# Altium PCB ADC_PCB.PcbDoc (part 1 of 2)
Units mil, origin at the board's own origin, x right, y up, seen from the top; angles counter-clockwise.
Board outline 5600 x 4000 mil, 4 copper layers (Top Layer, Plane(Gnd), Plane(Power), Bottom Layer), stack 23.756 mil thick; 244 components, 233 nets, 649 pads, 177 vias.
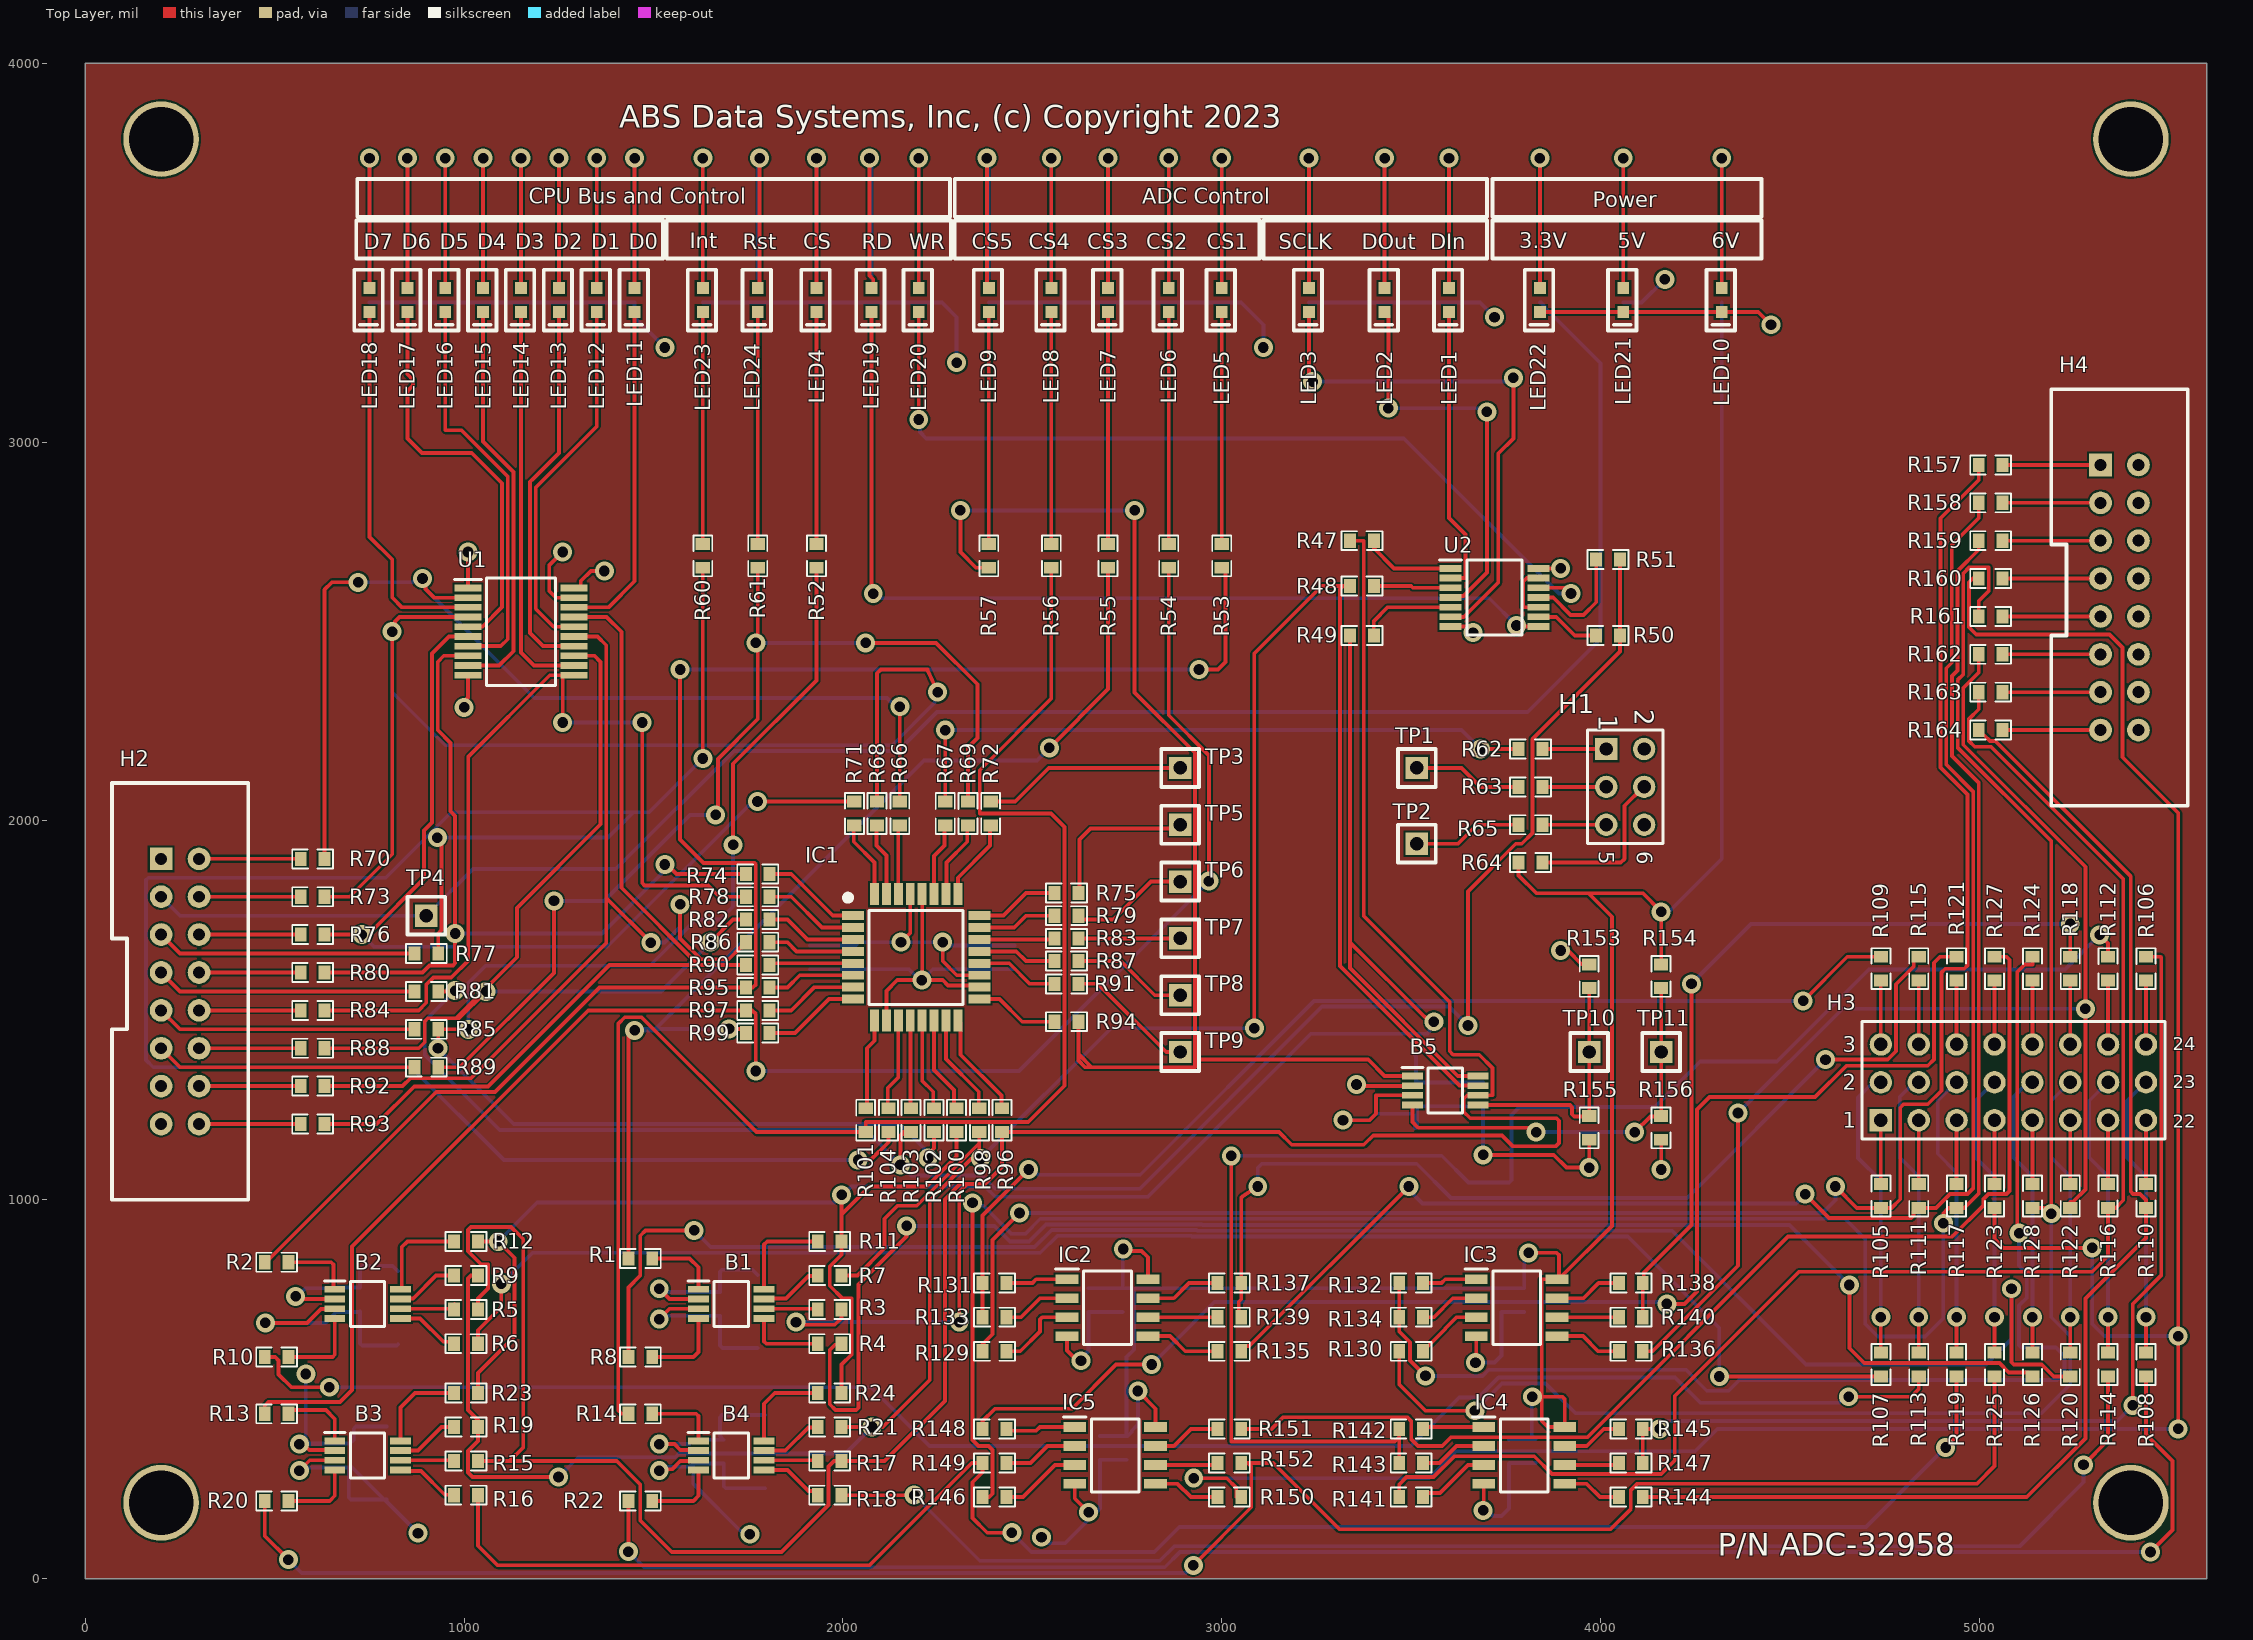
[diagram p0: Top Layer view]
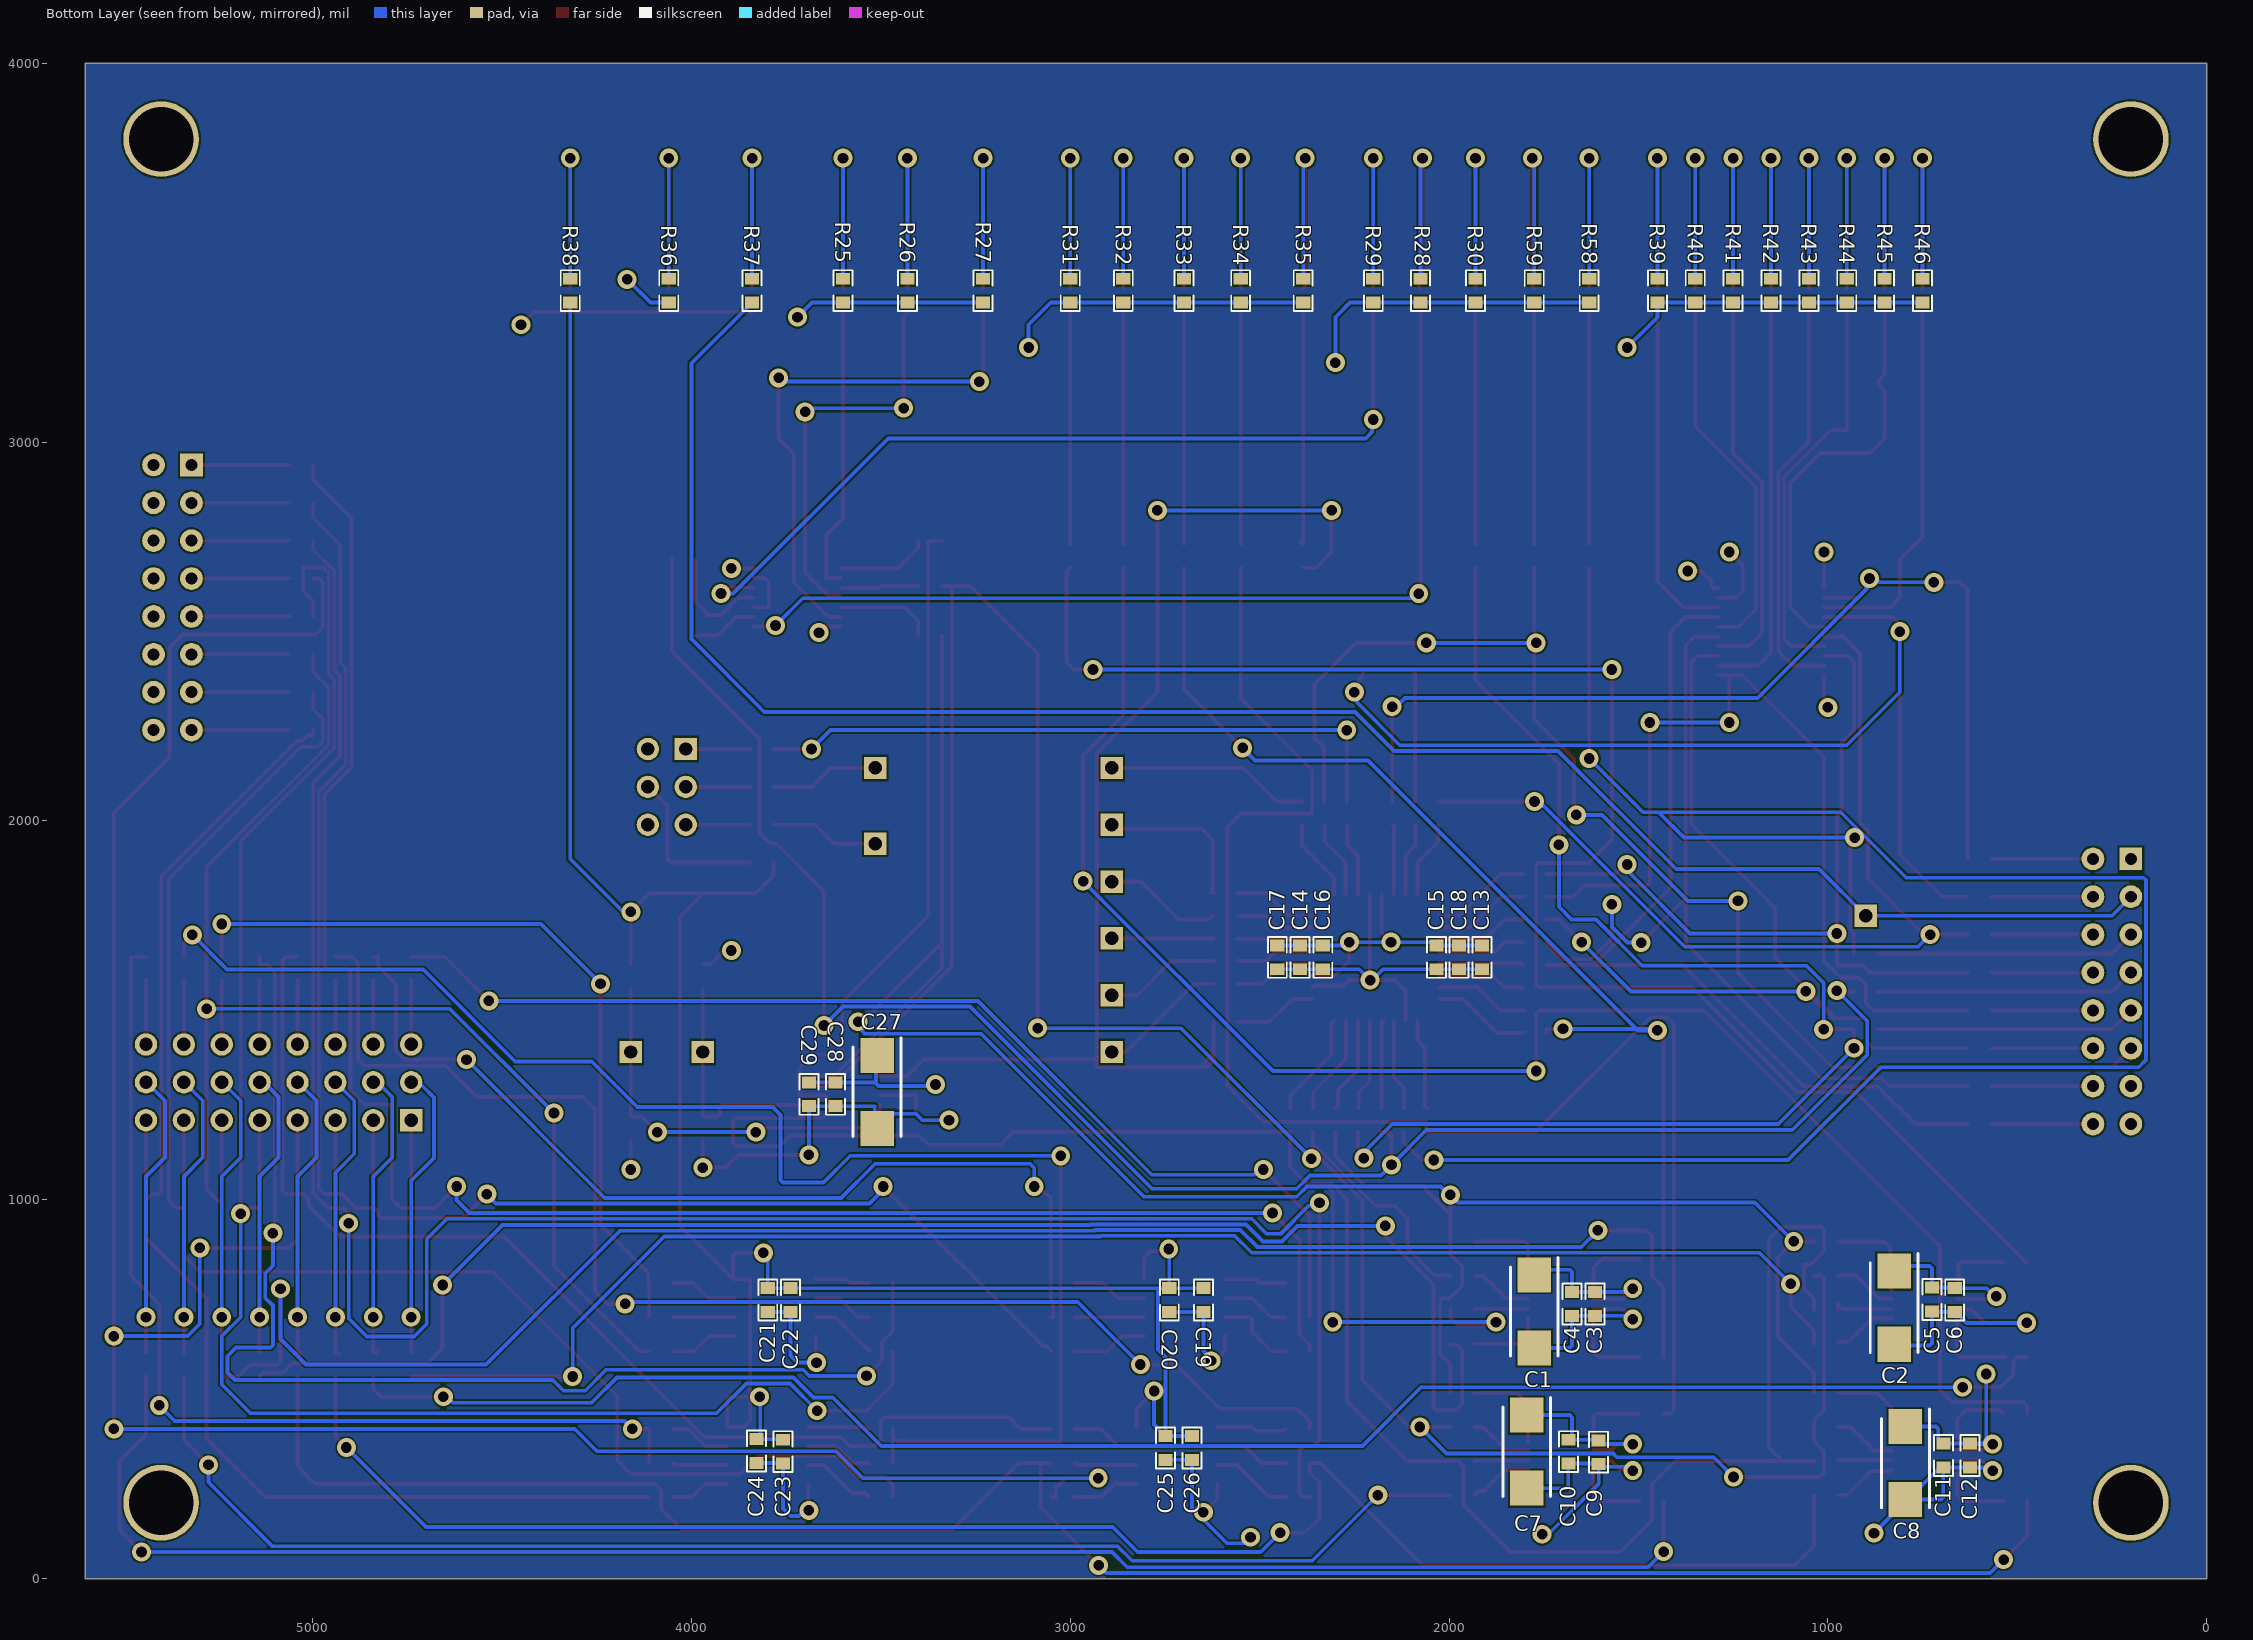
[diagram p1: Bottom Layer view, seen from below]
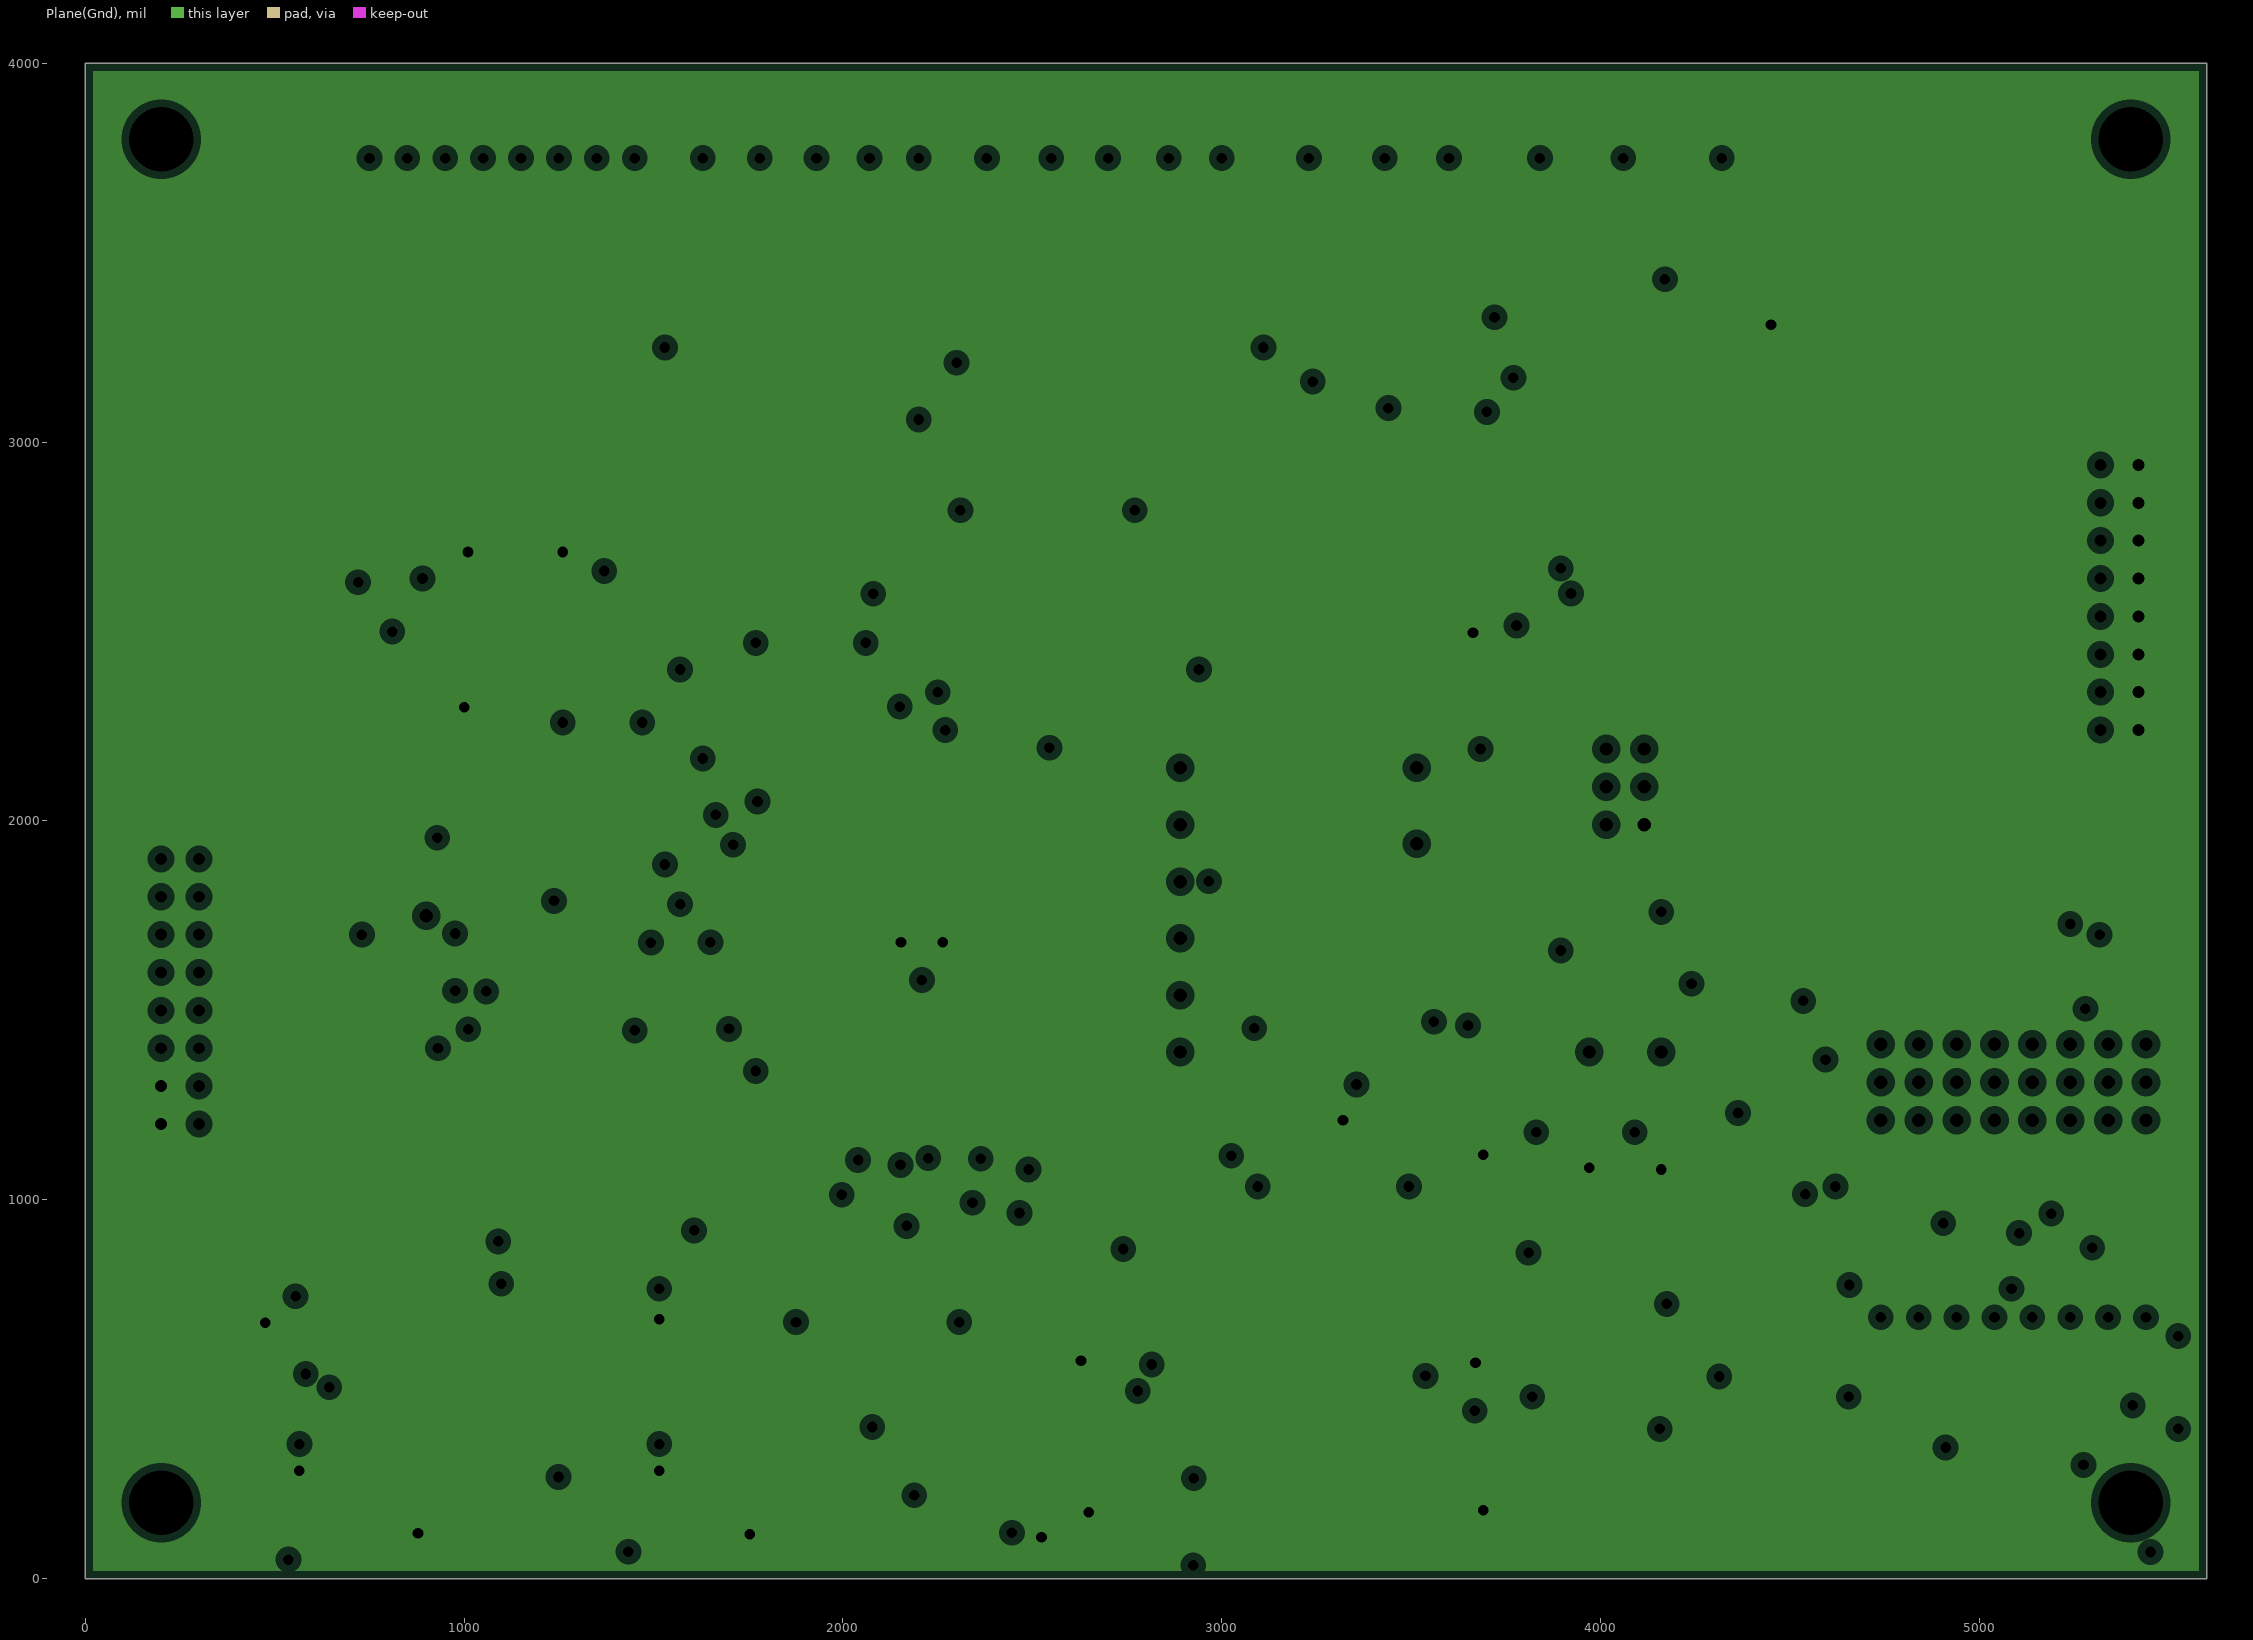
[diagram p2: Plane(Gnd), clearances drawn from the general rule]
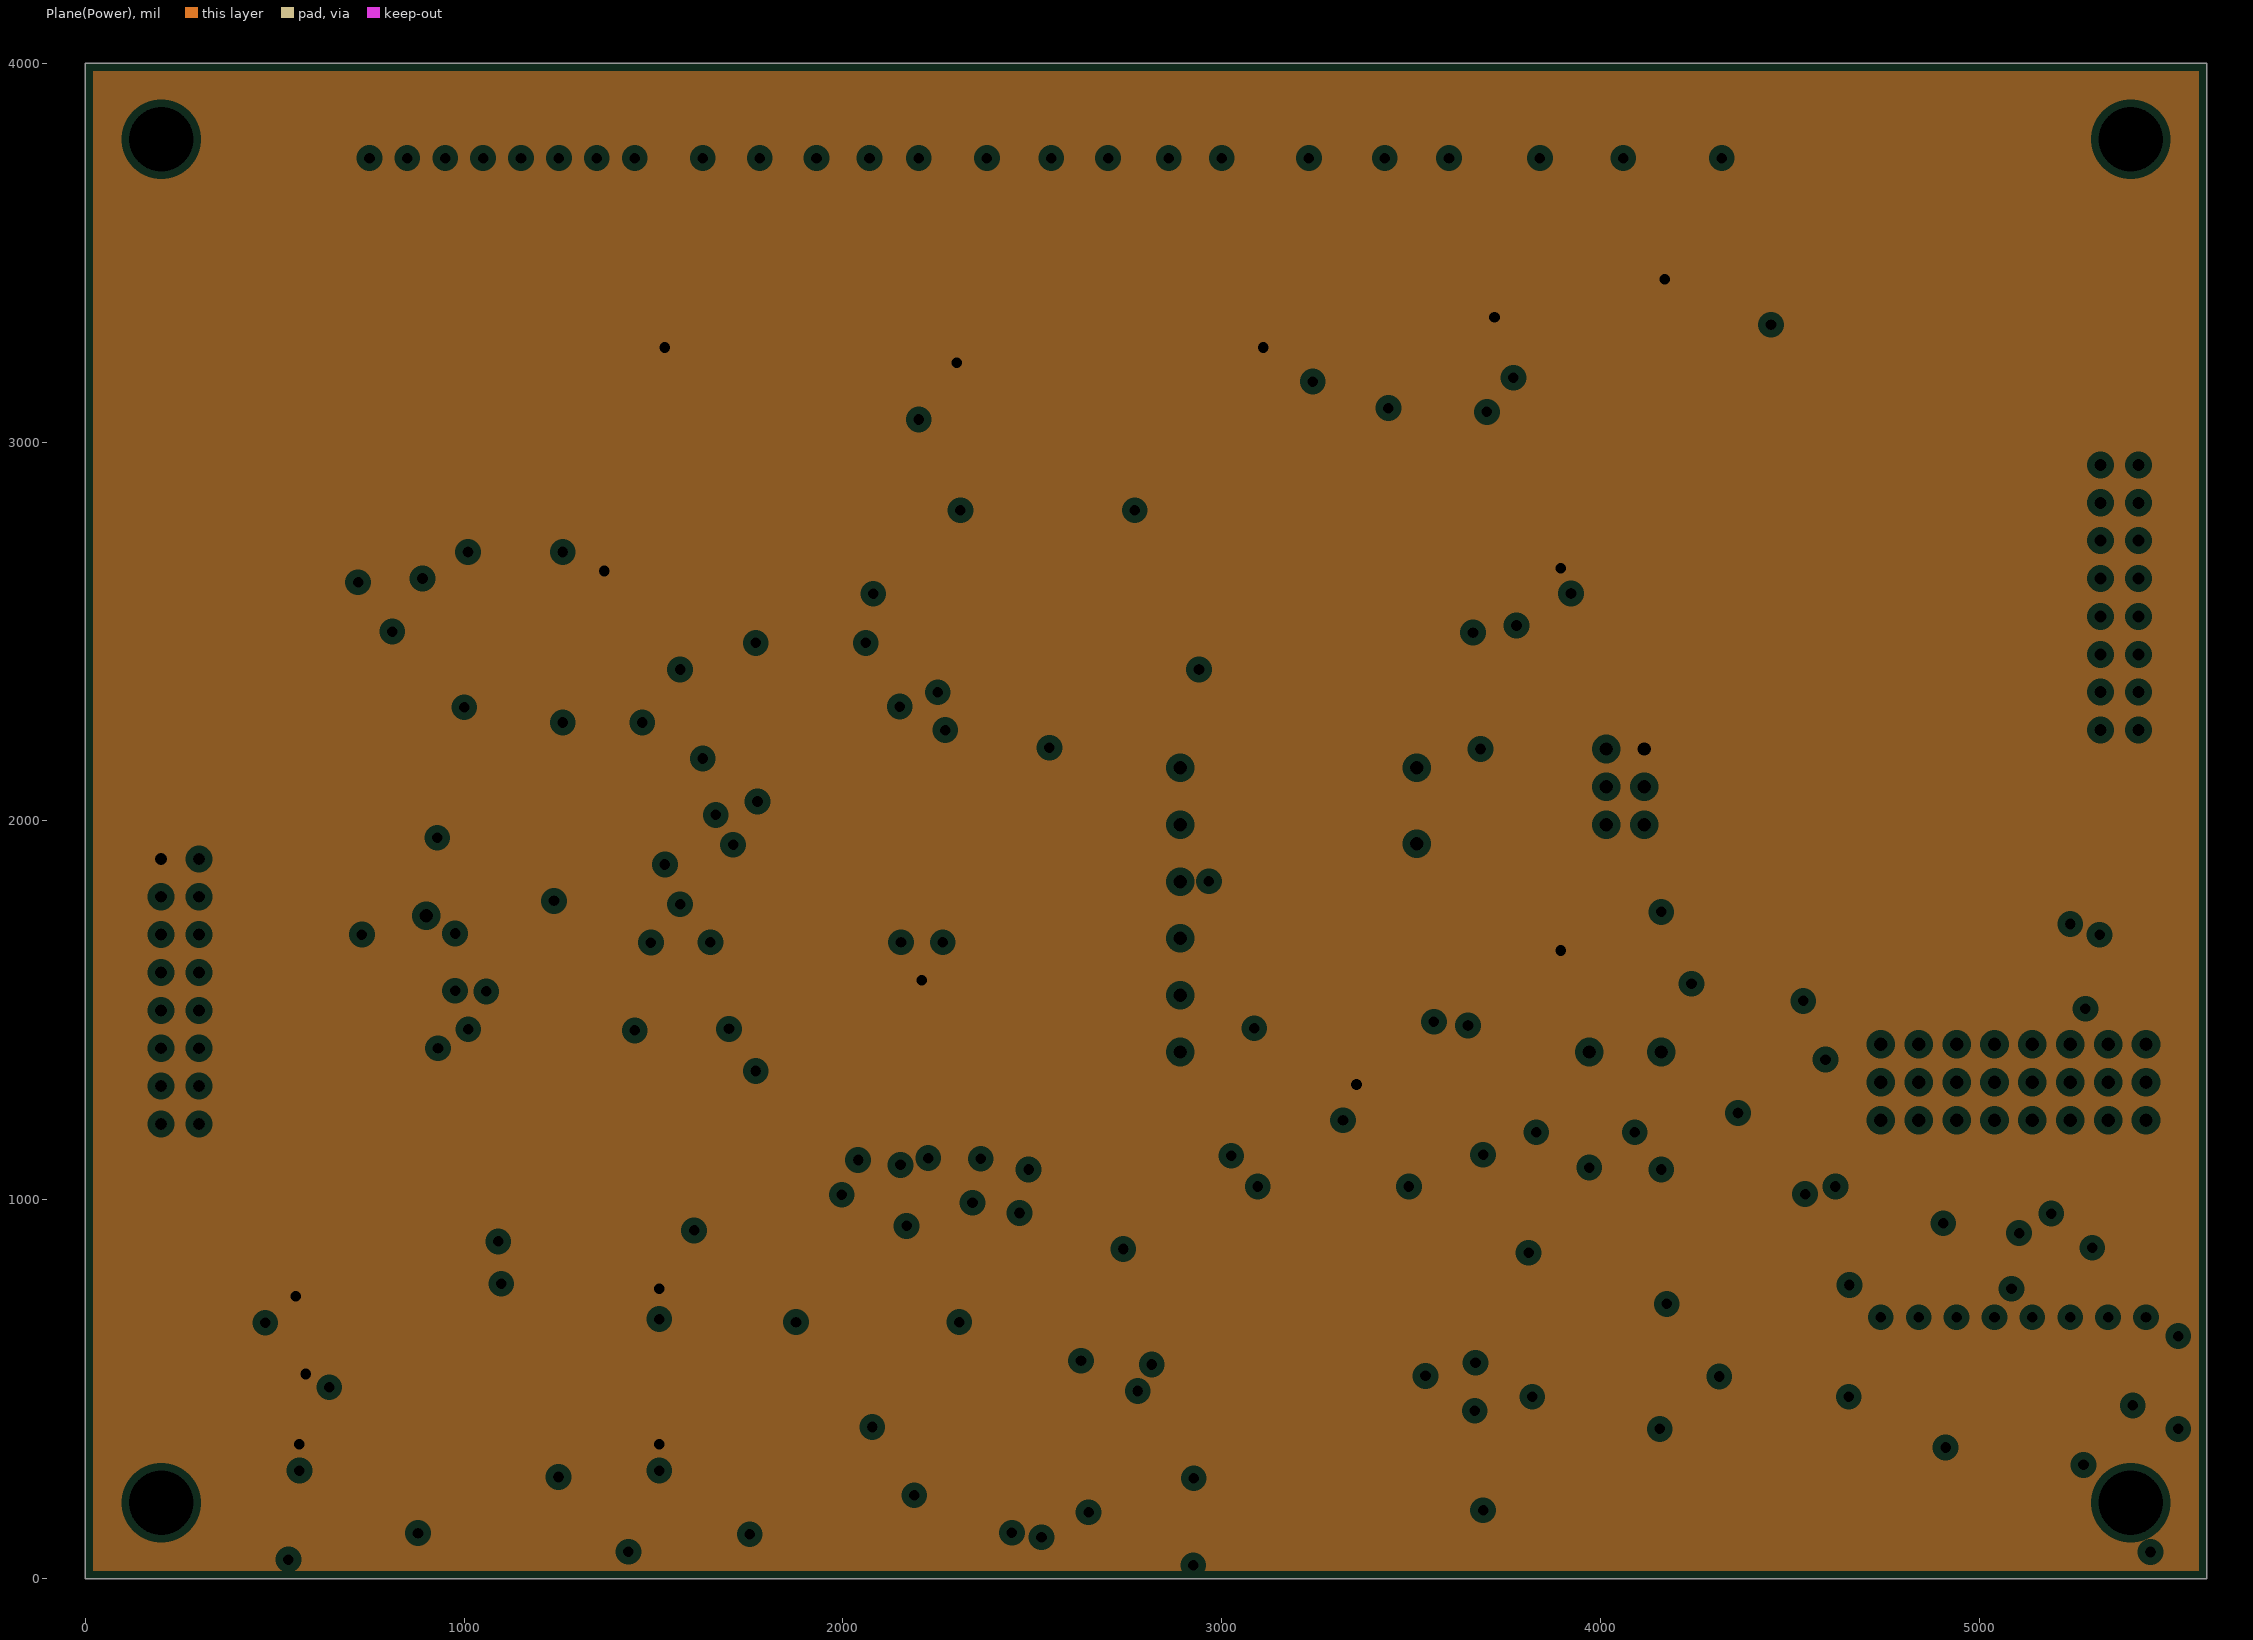
[diagram p3: Plane(Power), clearances drawn from the general rule]
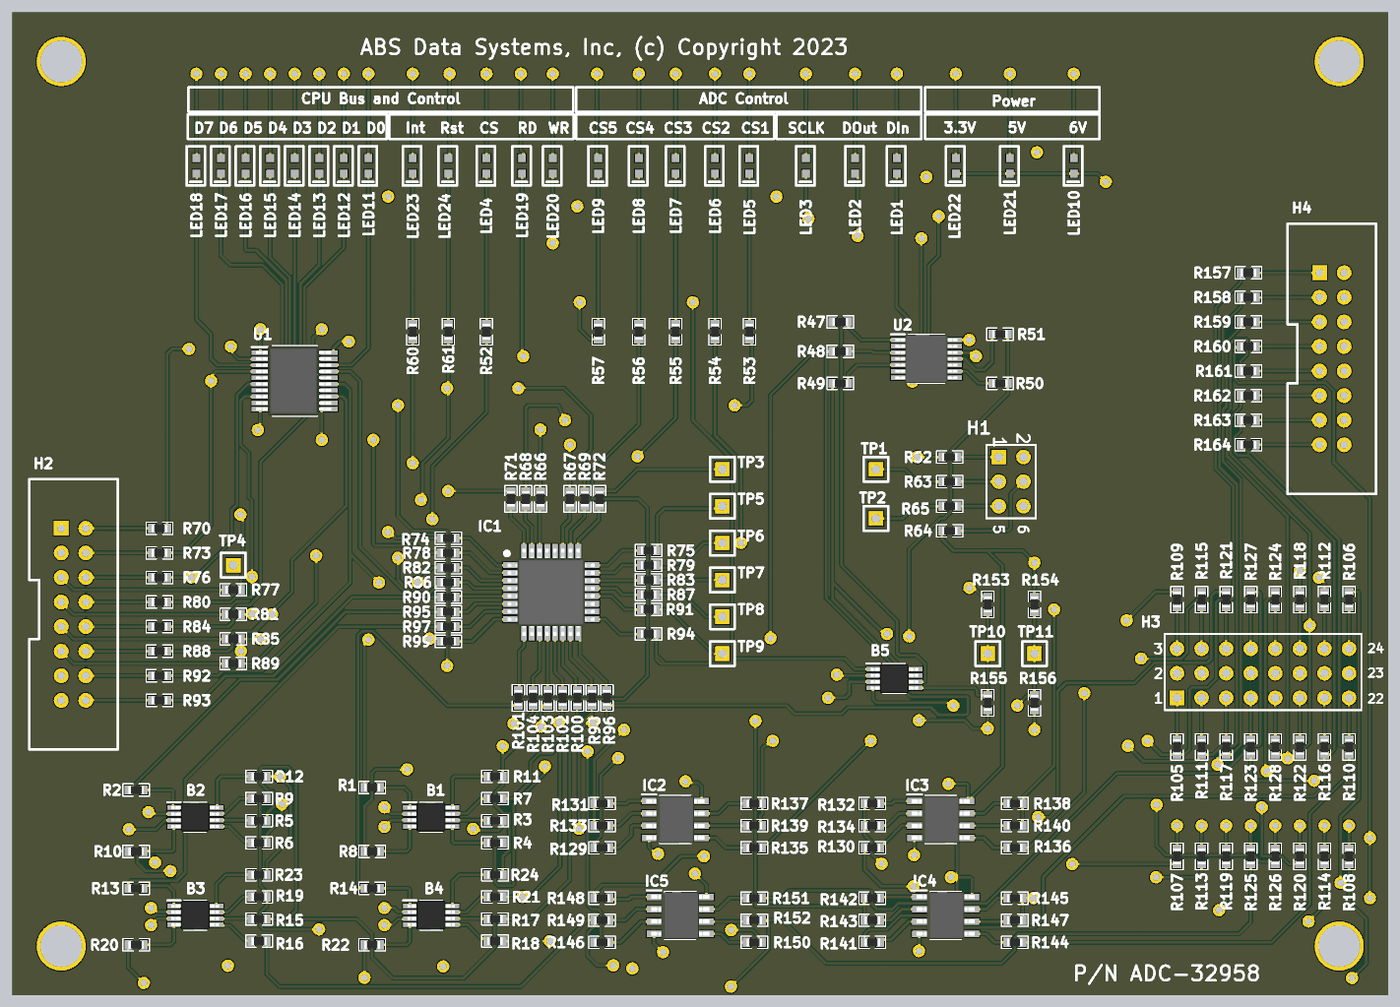
[diagram p5: 3D render of the assembled board from above, using the file's embedded part models]
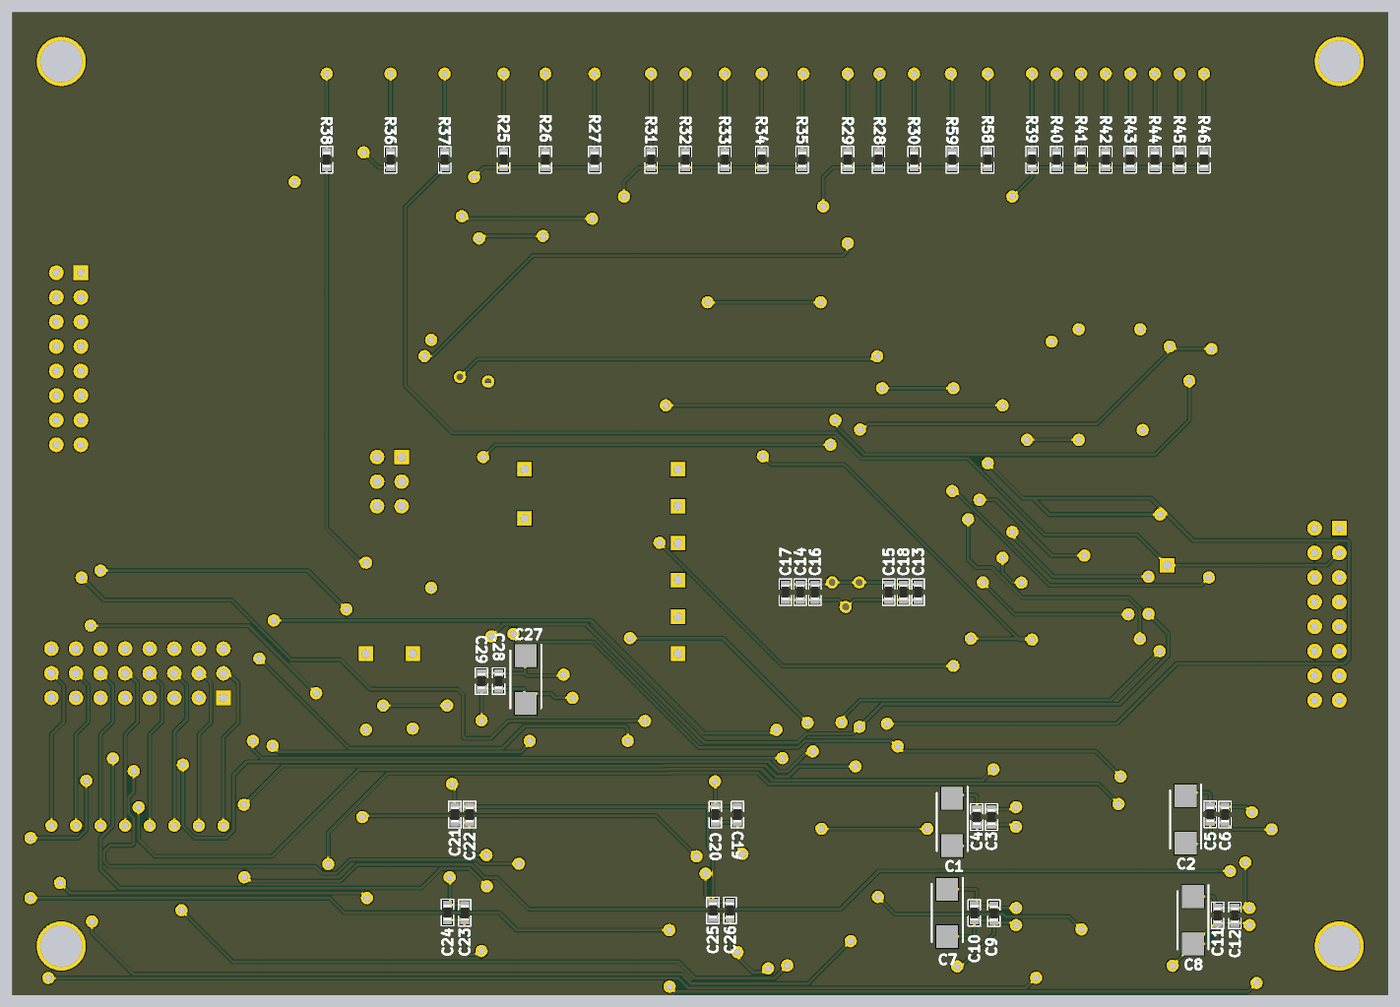
[diagram p6: 3D render of the assembled board from below, using the file's embedded part models]

## Layer stack, top to bottom
Top Solder: solder mask 0.4, Solder Resist, Dk 3.5
Top Layer: signal copper 1.4
Dielectric 2: prepreg 2.8, PP-006, Dk 4.1
Plane(Gnd): plane copper 1.378, net GND
Dielectric 1: dielectric 12.6, FR-4, Dk 4.8
Plane(Power): plane copper 1.378, net +5
Dielectric 3: prepreg 2.8, PP-006, Dk 4.1
Bottom Layer: signal copper 1.4
Bottom Solder: solder mask 0.4, Solder Resist, Dk 3.5

## Board outline
0,0 0,4000 5600,4000 5600,0

## Design rules (kind name [scope] priority, off if disabled: settings)
Clearance [All] p1: gap=5 ignorepadtopadclearanceinfootprint=FALSE
HoleSize [All] p1: absolutevalues=TRUE maxlimit=200 minlimit=1 maxpercent=80.000 minpercent=20.000
HoleToHoleClearance [All] p1: gap=5 allowstackedmicrovias=TRUE
MinimumSolderMaskSliver [All] p1: minsoldermaskwidth=4
PlaneClearance [All] p1: clearance=20
PlaneConnect [All] p1: planeconnectstyle=Relief reliefexpansion=20 reliefentries=4 reliefconductorwidth=10 reliefairgap=10
PolygonConnect [All] p1: connectstyle=Relief reliefconductorwidth=10 reliefentries=4 polygonreliefangle="90 Angle" airgapwidth=10
RoutingVias [All] p1: holewidth=28 width=50 viastyle="Through Hole" minholewidth=28 minwidth=50 maxholewidth=28 maxwidth=50
SilkToSilkClearance [All] p1: silktosilkclearance=5
SilkToSolderMaskClearance [IsPad] p1: minsilkscreentomaskgap=3.5 clearancetoexposedcopper=TRUE
SolderMaskExpansion [All] p1: expansion=4 istentingtop=FALSE
Width [All] p1: maxlimit=10 minlimit=10 preferedwidth=10
23 further rules are at their usual default settings.

## Classes and differential pairs
component class ADC_Unity_Gain: C19 C20 C21 C22 C23 C24 C25 C26 IC2 IC3 IC4 IC5 R129 R130 R131 R132 R133 R134 R135 R136 R137 R138 R139 R140 R141 R142 R143 R144 R145 R146 R147 R148 R149 R150 R151 R152 TitleBlock_5
component class ADC_LED_Monitor: LED1 LED2 LED3 LED4 LED5 LED6 LED7 LED8 LED9 LED10 LED11 LED12 LED13 LED14 LED15 LED16 LED17 LED18 LED19 LED20 LED21 LED22 LED23 LED24 R25 R26 R27 R28 R29 R30 R31 R32 R33 R34 R35 R36 R37 R38 R39 R40 R41 R42 R43 R44 R45 R46 R47 R48 R49 R50 R51 R52 R53 R54 R55 R56 R57 R58 R59 R60 R61 TitleBlock_2 U1 U2
component class ADC_Input: H4 R157 R158 R159 R160 R161 R162 R163 R164 TitleBlock_7
component class ADC_CPU: C13 C14 C15 C16 C17 C18 H1 H2 IC1 R62 R63 R64 R65 R66 R67 R68 R69 R70 R71 R72 R73 R74 R75 R76 R77 R78 R79 R80 R81 R82 R83 R84 R85 R86 R87 R88 R89 R90 R91 R92 R93 R94 R95 R96 R97 R98 R99 R100 R101 R102 R103 R104 TitleBlock_3 TP1 TP2 TP3 TP4 TP5 TP6 TP7 TP8 TP9
component class ADC_Configuration: H3 R105 R106 R107 R108 R109 R110 R111 R112 R113 R114 R115 R116 R117 R118 R119 R120 R121 R122 R123 R124 R125 R126 R127 R128 TitleBlock_4
component class ADC_Channels: B1 B2 B3 B4 C1 C2 C3 C4 C5 C6 C7 C8 C9 C10 C11 C12 R1 R2 R3 R4 R5 R6 R7 R8 R9 R10 R11 R12 R13 R14 R15 R16 R17 R18 R19 R20 R21 R22 R23 R24 TitleBlock_1
component class ADC_Calibration: B5 C27 C28 C29 R153 R154 R155 R156 TitleBlock_6 TP10 TP11

## Components (designator, comment, footprint, x,y, rotation, side; value= is the part's Value field where it differs from the comment)
B1 "ADC122S021CIMMX_NOPB" SOP65P490X110-8N 1705,725 r0 top locked
B2 "ADC122S021CIMMX_NOPB" SOP65P490X110-8N 745,725 r0 top locked
B3 "ADC122S021CIMMX_NOPB" SOP65P490X110-8N 745,325 r0 top locked
B4 "ADC122S021CIMMX_NOPB" SOP65P490X110-8N 1705,325 r0 top locked
B5 "ADC122S021CIMMX_NOPB" SOP65P490X110-8N 3590,1288.5 r0 top locked
C1 "293D475X9035C2TE3" CAPPM6032X280N 1775,705 r270 bottom locked
C2 "293D475X9035C2TE3" CAPPM6032X280N 825,715 r270 bottom locked
C3 "1uf" 0603 1615,725 r270 bottom locked
C4 "100nf" 0603 1675,725 r270 bottom locked
C5 "1uf" 0603 725,736.5 r270 bottom locked
C6 "100nf" 0603 665,735 r270 bottom locked
C7 "293D475X9035C2TE3" CAPPM6032X280N 1795,335 r270 bottom locked
C8 "293D475X9035C2TE3" CAPPM6032X280N 795,305 r270 bottom locked
C9 "1uf" 0603 1605,333.5 r270 bottom locked
C10 "100nf" 0603 1685,335 r270 bottom locked
C11 "1uf" 0603 695,325 r270 bottom locked
C12 "100nf" 0603 625,325 r270 bottom locked
C13 "1uf" 0603 1913.32,1640 r90 bottom locked
C14 "100nf" 0603 2393.32,1640 r90 bottom locked
C15 "1uf" 0603 2033.32,1640 r90 bottom locked
C16 "100nf" 0603 2333.32,1640 r90 bottom locked
C17 "1uf" 0603 2453.32,1640 r90 bottom locked
C18 "100nf" 0603 1973.32,1640 r90 bottom locked
C19 "1uf" 0603 2648.5,735 r270 bottom locked
C20 "100nf" 0603 2738.5,735 r270 bottom locked
C21 "1uf" 0603 3798.5,735 r270 bottom locked
C22 "100nf" 0603 3738.5,735 r270 bottom locked
C23 "1uf" 0603 3758.5,335 r270 bottom locked
C24 "100nf" 0603 3828.5,336.5 r270 bottom locked
C25 "100nf" 0603 2748.5,345 r270 bottom locked
C26 "1uf" 0603 2678.5,345 r270 bottom locked
C27 "293D475X9035C2TE3" CAPPM6032X280N 3510,1284.96 r270 bottom locked
C28 "1uf" 0603 3620,1278.5 r270 bottom locked
C29 "100nf" 0603 3690,1278.5 r270 bottom locked
H1 "UDPI Programmer" HDR2X3 4015,2190 r270 top locked
H2 "Header_IDC_2x8" HEADER16 200,1900 r0 top
H3 "Header_3x8" HDR3X8 4740,1210 r0 top
H4 "Header_IDC_2x8" HEADER16 5320,2940 r0 top locked
IC1 "AVR64DD32-I_PT" QFP80P900X900X120-32N 2193.32,1640 r0 top locked
IC2 "LM358DR" SOIC127P600X175-8N 2698.5,715 r0 top locked
IC3 "LM358DR" SOIC127P600X175-8N 3778.5,715 r0 top locked
IC4 "LM358DR" SOIC127P600X175-8N 3798.5,325 r0 top locked
IC5 "LM358DR" SOIC127P600X175-8N 2718.5,325 r0 top locked
LED1 "green" 0603_DIODE 3600,3375 r90 top
LED2 "green" 0603_DIODE 3430,3375 r90 top
LED3 "green" 0603_DIODE 3230,3375 r90 top
LED4 "green" 0603_DIODE 1930,3375 r90 top
LED5 "green" 0603_DIODE 3000,3375 r90 top
LED6 "green" 0603_DIODE 2860,3375 r90 top
LED7 "green" 0603_DIODE 2700,3375 r90 top
LED8 "green" 0603_DIODE 2550,3375 r90 top
LED9 "green" 0603_DIODE 2385,3375 r90 top
LED10 "blue" 0603_DIODE 4320,3375 r90 top
LED11 "green" 0603_DIODE 1450,3375 r90 top
LED12 "green" 0603_DIODE 1350,3375 r90 top
LED13 "green" 0603_DIODE 1250,3375 r90 top
LED14 "green" 0603_DIODE 1150,3375 r90 top
LED15 "green" 0603_DIODE 1050,3375 r90 top
LED16 "green" 0603_DIODE 950,3375 r90 top
LED17 "green" 0603_DIODE 850,3375 r90 top
LED18 "green" 0603_DIODE 750,3375 r90 top
LED19 "green" 0603_DIODE 2075,3375 r90 top
LED20 "red" 0603_DIODE 2200,3375 r90 top
LED21 "red" 0603_DIODE 4060,3375 r90 top
LED22 "amber" 0603_DIODE 3840,3375 r90 top
LED23 "amber" 0603_DIODE 1630,3375 r90 top
LED24 "blue" 0603_DIODE 1775,3375 r90 top
R1 "0R" 0603 1465,845 r0 top locked
R2 "0R" 0603 505,835 r0 top locked
R3 "0R" 0603 1965,710 r180 top locked
R4 "0R" 0603 1965,620 r0 top locked
R5 "0R" 0603 1005,710 r180 top locked
R6 "0R" 0603 1005,620 r0 top locked
R7 "0R" 0603 1965,800 r180 top locked
R8 "0R" 0603 1465,585 r180 top locked
R9 "0R" 0603 1005,800 r180 top locked
R10 "0R" 0603 505,585 r180 top locked
R11 "0R" 0603 1965,890 r180 top locked
R12 "0R" 0603 1005,890 r180 top locked
R13 "0R" 0603 505,435 r0 top locked
R14 "0R" 0603 1465,435 r0 top locked
R15 "0R" 0603 1005,310 r180 top locked
R16 "0R" 0603 1005,220 r0 top locked
R17 "0R" 0603 1965,310 r180 top locked
R18 "0R" 0603 1965,220 r0 top locked
R19 "0R" 0603 1005,400 r180 top locked
R20 "0R" 0603 505,205 r180 top locked
R21 "0R" 0603 1965,400 r180 top locked
R22 "0R" 0603 1465,205 r180 top locked
R23 "0R" 0603 1005,490 r180 top locked
R24 "0R" 0603 1965,490 r180 top locked
R25 "180" 0603 3600,3400 r270 bottom
R26 "180" 0603 3430,3400 r270 bottom
R27 "180" 0603 3230,3400 r270 bottom
R28 "180" 0603 2075,3400 r270 bottom
R29 "180" 0603 2200,3400 r270 bottom
R30 "180" 0603 1930,3400 r270 bottom
R31 "180" 0603 3000,3400 r270 bottom
R32 "180" 0603 2860,3400 r270 bottom
R33 "180" 0603 2700,3400 r270 bottom
R34 "180" 0603 2550,3400 r270 bottom
R35 "180" 0603 2385,3400 r270 bottom
R36 "180" 0603 4060,3400 r270 bottom
R37 "47" 0603 3840,3400 r90 bottom
R38 "180" 0603 4320,3400 r270 bottom
R39 "180" 0603 1450,3400 r270 bottom
R40 "180" 0603 1350,3400 r270 bottom
R41 "180" 0603 1250,3400 r270 bottom
R42 "180" 0603 1150,3400 r270 bottom
R43 "180" 0603 1050,3400 r270 bottom
R44 "180" 0603 950,3400 r270 bottom
R45 "180" 0603 850,3400 r270 bottom
R46 "180" 0603 750,3400 r270 bottom
R47 "0R" 0603 3370,2740 r0 top
R48 "0R" 0603 3370,2620 r0 top
R49 "0R" 0603 3370,2490 r0 top
R50 "0R" 0603 4020,2490 r180 top
R51 "0R" 0603 4020,2690 r180 top
R52 "0R" 0603 1930,2700 r90 top locked
R53 "0R" 0603 3000,2700 r90 top
R54 "0R" 0603 2860,2700 r90 top
R55 "0R" 0603 2700,2700 r90 top
R56 "0R" 0603 2550,2700 r90 top
R57 "0R" 0603 2385,2700 r90 top
R58 "180" 0603 1630,3400 r270 bottom
R59 "100" 0603 1775,3400 r90 bottom
R60 "0R" 0603 1630,2700 r90 top locked
R61 "0R" 0603 1775,2700 r90 top locked
R62 "0R" 0603 3815,2190 r0 top locked
R63 "0R" 0603 3815,2090 r0 top locked
R64 "0R" 0603 3815,1890 r180 top locked
R65 "0R" 0603 3815,1990 r0 top locked
R66 "0R" 0603 2150,2020 r270 top locked
R67 "0R" 0603 2270,2020 r90 top locked
R68 "0R" 0603 2090,2020 r270 top locked
R69 "0R" 0603 2330,2020 r90 top locked
R70 "0R" 0603 600,1900 r180 top
R71 "0R" 0603 2030,2020 r270 top locked
R72 "0R" 0603 2390,2020 r90 top locked
R73 "0R" 0603 600,1800 r180 top
R74 "0R" 0603 1775,1860 r0 top locked
R75 "0R" 0603 2590,1810 r0 top locked
R76 "0R" 0603 600,1700 r180 top
R77 "0R" 0603 900,1650 r0 top
R78 "0R" 0603 1775,1800 r0 top locked
R79 "0R" 0603 2590,1750 r0 top locked
R80 "0R" 0603 600,1600 r180 top
R81 "0R" 0603 900,1550 r0 top
R82 "0R" 0603 1775,1740 r0 top locked
R83 "0R" 0603 2590,1690 r0 top locked
R84 "0R" 0603 600,1500 r180 top
R85 "0R" 0603 900,1450 r0 top
R86 "0R" 0603 1775,1680 r0 top locked
R87 "0R" 0603 2590,1630 r0 top locked
R88 "0R" 0603 600,1400 r180 top
R89 "0R" 0603 900,1350 r0 top
R90 "0R" 0603 1775,1620 r0 top locked
R91 "0R" 0603 2590,1570 r0 top locked
R92 "0R" 0603 600,1300 r180 top
R93 "0R" 0603 600,1200 r180 top
R94 "0R" 0603 2590,1470 r0 top locked
R95 "0R" 0603 1775,1560 r0 top locked
R96 "0R" 0603 2420,1210 r270 top locked
R97 "0R" 0603 1775,1500 r0 top locked
R98 "0R" 0603 2360,1210 r270 top locked
R99 "0R" 0603 1775,1440 r0 top locked
R100 "0R" 0603 2300,1210 r270 top locked
R101 "0R" 0603 2060,1210 r90 top locked
R102 "0R" 0603 2240,1210 r270 top locked
R103 "0R" 0603 2180,1210 r270 top locked
R104 "0R" 0603 2120,1210 r270 top locked
R105 "0R" 0603 4740,1010 r90 top locked
R106 "0R" 0603 5440,1610 r90 top locked
R107 "0R" 0603 4740,565 r90 top locked
R108 "0R" 0603 5440,565 r270 top locked
R109 "0R" 0603 4740,1610 r270 top locked
R110 "0R" 0603 5440,1010 r270 top locked
R111 "0R" 0603 4840,1010 r90 top locked
R112 "0R" 0603 5340,1610 r90 top locked
R113 "0R" 0603 4840,565 r90 top locked
R114 "0R" 0603 5340,565 r270 top locked
R115 "0R" 0603 4840,1610 r270 top locked
R116 "0R" 0603 5340,1010 r270 top locked
R117 "0R" 0603 4940,1010 r90 top locked
R118 "0R" 0603 5240,1610 r90 top locked
R119 "0R" 0603 4940,565 r90 top locked
R120 "0R" 0603 5240,565 r270 top locked
R121 "0R" 0603 4940,1610 r270 top locked
R122 "0R" 0603 5240,1010 r270 top locked
R123 "0R" 0603 5040,1010 r90 top locked
R124 "0R" 0603 5140,1610 r90 top locked
R125 "0R" 0603 5040,565 r90 top locked
R126 "0R" 0603 5140,565 r270 top locked
R127 "0R" 0603 5040,1610 r270 top locked
R128 "0R" 0603 5140,1010 r270 top locked
R129 "0R" 0603 2400,600 r180 top locked
R130 "0R" 0603 3500,600 r180 top locked
R131 "0R" 0603 2400,780 r0 top locked
R132 "0R" 0603 3500,780 r0 top locked
R133 "0R" 0603 2400,690 r180 top locked
R134 "0R" 0603 3500,690 r180 top locked
R135 "0R" 0603 3020,600 r0 top locked
R136 "0R" 0603 4080,600 r0 top locked
R137 "0R" 0603 3020,780 r180 top locked
R138 "0R" 0603 4080,780 r180 top locked
R139 "0R" 0603 3020,690 r0 top locked
R140 "0R" 0603 4080,690 r0 top locked
R141 "0R" 0603 3500,215 r180 top locked
R142 "0R" 0603 3500,395 r0 top locked
R143 "0R" 0603 3500,305 r180 top locked
R144 "0R" 0603 4080,215 r0 top locked
R145 "0R" 0603 4080,395 r180 top locked
R146 "0R" 0603 2400,215 r180 top locked
R147 "0R" 0603 4080,305 r0 top locked
R148 "0R" 0603 2400,395 r0 top locked
R149 "0R" 0603 2400,305 r180 top locked
R150 "0R" 0603 3020,215 r0 top locked
R151 "0R" 0603 3020,395 r180 top locked
R152 "0R" 0603 3020,305 r0 top locked
R153 "220" 0603 3970,1590 r270 top locked
R154 "220" 0603 4160,1590 r90 top locked
R155 "220" 0603 3970,1190 r90 top locked
R156 "220" 0603 4160,1190 r270 top locked
R157 "0R" 0603 5030,2940 r0 top locked
R158 "0R" 0603 5030,2840 r0 top locked
R159 "0R" 0603 5030,2740 r0 top locked
R160 "0R" 0603 5030,2640 r0 top locked
R161 "0R" 0603 5030,2540 r0 top locked
R162 "0R" 0603 5030,2440 r0 top locked
R163 "0R" 0603 5030,2340 r0 top locked
R164 "0R" 0603 5030,2240 r0 top locked
TP1 "TP" TP 3515,2140 r0 top locked
TP2 "TP" TP 3515,1940 r0 top locked
TP3 "TP" TP 2890,2140 r0 top locked
TP4 "TP" TP 900,1750 r0 top
TP5 "TP" TP 2890,1990 r0 top locked
TP6 "TP" TP 2890,1840 r0 top locked
TP7 "TP" TP 2890,1690 r0 top locked
TP8 "TP" TP 2890,1540 r0 top locked
TP9 "TP" TP 2890,1390 r0 top locked
TP10 "TP" TP 3970,1390 r0 top
TP11 "TP" TP 4160,1390 r0 top
U1 "SN74ABT240ADBR" SOP65P780X200-20N 1150,2500 r0 top locked
U2 "SN74AC04PWR" SOP65P640X120-14N 3720,2590 r0 top

## Footprints (in the part's own frame and the unit in brackets; to place one, negate y for a bottom-side part, rotate by r counter-clockwise, add the part's x,y. Pads: shape width x height; smd on the part's side, far side on the other; paste and mask are expansions set on the pad)
0603 [mm]
  rect 0.8x0.95 smd: 1(-0.8,0) 2(0.8,0)
  silkscreen extent -1.37,-0.64 1.37,0.64, body extent -0.8,-0.4 0.8,0.4, height 0.55
0603_DIODE [mm]
  rect 0.8x0.8 smd: 1(-0.8,0) 2(0.8,0)
  silkscreen extent -2.03,-0.89 2.03,1.02
CAPPM6032X280N [mm]
  rect 2.35x2.25 smd: 1(-2.45,0) 2(2.45,0)
  silkscreen extent -3.62,-1.6 3,1.6
HDR2X3 [mm] "Connector; Header; 3x2 Position"
  rect 1.5x1.5 hole 0.9: 1(0,0)
  round 1.5 hole 0.9: 2(0,2.54) 3(2.54,0) 4(2.54,2.54) 5(5.08,0) 6(5.08,2.54)
  silkscreen extent -1.27,-1.27 6.35,3.81
HDR3X8 [mm] "Connector; Header; 8x2 Position"
  rect 1.5x1.5 hole 0.9: 1(0,0)
  round 1.5 hole 0.9: 2(0,2.54) 3(0,5.08) 4(2.54,0) 5(2.54,2.54) 6(2.54,5.08) 7(5.08,0) 8(5.08,2.54) 9(5.08,5.08) 10(7.62,0) 11(7.62,2.54) 12(7.62,5.08) 13(10.16,0) 14(10.16,2.54) 15(10.16,5.08) 16(12.7,0) 17(12.7,2.54) 18(12.7,5.08) 19(15.24,0) 20(15.24,2.54) 21(15.24,5.08) 22(17.78,0) 23(17.78,2.54) 24(17.78,5.08)
  silkscreen extent -1.27,-1.27 19.05,6.6
HEADER16 [mil]
  rect 60x60 hole 31.5: 1(0,0)
  round 60 hole 31.5: 2(100,0) 3(0,-100) 4(100,-100) 5(0,-200) 6(100,-200) 7(0,-300) 8(100,-300) 9(0,-400) 10(100,-400) 11(0,-500) 12(100,-500) 13(0,-600) 14(100,-600) 15(0,-700) 16(100,-700)
  silkscreen extent -130,-900 230,200
QFP80P900X900X120-32N [mm]
  rect 1.475x0.6 smd: 1(-4.238,2.8) 2(-4.238,2) 3(-4.238,1.2) 4(-4.238,0.4) 5(-4.238,-0.4) 6(-4.238,-1.2) 7(-4.238,-2) 8(-4.238,-2.8) 17(4.238,-2.8) 18(4.238,-2) 19(4.238,-1.2) 20(4.238,-0.4) 21(4.238,0.4) 22(4.238,1.2) 23(4.238,2) 24(4.238,2.8)
  rect 0.6x1.475 smd: 9(-2.8,-4.238) 10(-2,-4.238) 11(-1.2,-4.238) 12(-0.4,-4.238) 13(0.4,-4.238) 14(1.2,-4.238) 15(2,-4.238) 16(2.8,-4.238) 25(2.8,4.238) 26(2,4.238) 27(1.2,4.238) 28(0.4,4.238) 29(-0.4,4.238) 30(-1.2,4.238) 31(-2,4.238) 32(-2.8,4.238)
  silkscreen extent -4.77,-3.15 3.15,4.2, body extent -4.5,-4.5 4.5,4.5, height 1.2
SOIC127P600X175-8N [mm]
  rect 1.528x0.65 smd: 1(-2.711,1.905) 2(-2.711,0.635) 3(-2.711,-0.635) 4(-2.711,-1.905) 5(2.711,-1.905) 6(2.711,-0.635) 7(2.711,0.635) 8(2.711,1.905)
  silkscreen extent -3.48,-2.45 1.6,2.58, body extent -3.01,-2.45 3.01,2.45, height 1.63
SOP65P490X110-8N [mm]
  rect 1.4x0.45 smd: 1(-2.2,0.975) 2(-2.2,0.325) 3(-2.2,-0.325) 4(-2.2,-0.975) 5(2.2,-0.975) 6(2.2,-0.325) 7(2.2,0.325) 8(2.2,0.975)
  silkscreen extent -2.9,-1.5 1.15,1.55, body extent -2.45,-1.5 2.45,1.5, height 1.1
SOP65P640X120-14N [mm]
  rect 1.475x0.45 smd: 1(-2.938,1.95) 2(-2.938,1.3) 3(-2.938,0.65) 4(-2.938,0) 5(-2.938,-0.65) 6(-2.938,-1.3) 7(-2.938,-1.95) 8(2.938,-1.95) 9(2.938,-1.3) 10(2.938,-0.65) 11(2.938,0) 12(2.938,0.65) 13(2.938,1.3) 14(2.938,1.95)
  silkscreen extent -3.67,-2.5 1.85,2.53, body extent -3.2,-2.5 3.2,2.5, height 1.13
SOP65P780X200-20N [mm]
  rect 1.8x0.45 smd: 1(-3.55,2.925) 2(-3.55,2.275) 3(-3.55,1.625) 4(-3.55,0.975) 5(-3.55,0.325) 6(-3.55,-0.325) 7(-3.55,-0.975) 8(-3.55,-1.625) 9(-3.55,-2.275) 10(-3.55,-2.925) 11(3.55,-2.925) 12(3.55,-2.275) 13(3.55,-1.625) 14(3.55,-0.975) 15(3.55,-0.325) 16(3.55,0.325) 17(3.55,0.975) 18(3.55,1.625) 19(3.55,2.275) 20(3.55,2.925)
  silkscreen extent -4.45,-3.6 2.3,3.6, body extent -4.03,-3.6 3.77,3.6, height 1.9
TP [mm] "Test Point"
  rect 1.5x1.5 hole 0.9: 1(0,0)
  silkscreen extent -1.27,-1.27 1.27,1.27

## Part data
B1 B2 B3 B4 B5: "2 Channel, 50 ksps to 200 ksps 12-Bit A/D Converter", Manufacturer_Name="Texas Instruments", Manufacturer_Part_Number=ADC122S021CIMMX/NOPB, Mouser Part Number=926-A122S021CIMMXNPB, Datasheet Link=http://www.ti.com/lit/gpn/ADC122S021, Geometry.Height=1.1mm, Mouser Price/Stock=https://www.mouser.co.uk/ProductDetail/Texas-Instruments/ADC122S021CIMMX-NOPB/?qs=7X5t%252BdzoRHB2bC7Teu8H3A%3D%3D
C1 C2 C7 C8 C27: "Solid Tantalum Surface Mount Chip Capacitors TANTAMOUNT(TM), Molded Case, Standard Industrial Grade", Manufacturer_Name=Vishay, Mouser Part Number=74-293D475X9035C2TE3, Datasheet Link=http://www.vishay.com/docs/40002/293d.pdf, Geometry.Height=2.8mm, Manufacturer_Part_Number=293D475X9035C2TE3, Mouser Price/Stock=https://www.mouser.co.uk/ProductDetail/Vishay-Sprague/293D475X9035C2TE3?qs=L4BSZja3YaK5uiX7PSIEuA%3D%3D
C3 C5 C9 C11 C13 C15 C17 C19 C21 C23 C26 C28: library part CL10B105KA8NNNL, "Samsung Electro-Mechanics 0603 1uf"
C4 C6 C10 C12 C14 C16 C18 C20 C22 C24 C25 C29: library part CL10B104JB8NNNC, "Samsung Electro-Mechanics 0603 100nf"
H1: "6 Pin 2X3 Through Hole Header"
H2 H4: "16 Pin 2x8 Through Hold IDC Connector", Color=Black, Manufacturer=Samtec, Manufacturer Part Number=TST-108-01-G-D, Max Operating Temperature=125°C, Min Operating Temperature=-55°C, Supplier Part Number 1=SAM10835-ND, Category="Headers and Wire Housings", ComponentLink1Description=https://datasheet.ciiva.com/739/tst-mkt-739845.pdf?src-supplier=Digi-Key, ComponentLink1URL=https://datasheet.ciiva.com/739/tst-mkt-739845.pdf?src-supplier=Digi-Key, ComponentLink2Description=https://datasheet.ciiva.com/10018/htst-10018510.pdf?src-supplier=Avnet, ComponentLink2URL=https://datasheet.ciiva.com/10018/htst-10018510.pdf?src-supplier=Avnet, Connector Type="Male Pin", Contact Material=Bronze, Contact Mating Length=0.25inch, Contact Plating=Gold, Depth=9.27mm, Gender=Male, Housing Color=Black, Housing Material=Polyester, Length=27.94mm, Mount="Through Hole", Number of Contacts=16, Number of Positions=16, Number of Rows=2, Orientation=Straight, Packaging=Rail/Tube, Pitch=2.54mm, Pricing 1="1=2.85000, 10=2.73600, 100=2.28000, 500=1.93800, 1000=1.65300, 5000=1.48200 (USD)", REACH SVHC="No SVHC", RoHS=Yes, Row Spacing=0.1inch, Stock 1=227, Supplier 1=Digi-Key, Termination=Solder
H3: "16 Pin 3x8 Through Hold Jumprts", Color=Black, Manufacturer=Samtec, Manufacturer Part Number=TST-108-01-G-D, Max Operating Temperature=125°C, Min Operating Temperature=-55°C, Category="Headers and Wire Housings", ComponentLink1Description=https://datasheet.ciiva.com/739/tst-mkt-739845.pdf?src-supplier=Digi-Key, ComponentLink1URL=https://datasheet.ciiva.com/739/tst-mkt-739845.pdf?src-supplier=Digi-Key, ComponentLink2Description=https://datasheet.ciiva.com/10018/htst-10018510.pdf?src-supplier=Avnet, ComponentLink2URL=https://datasheet.ciiva.com/10018/htst-10018510.pdf?src-supplier=Avnet, Connector Type="Male Pin", Contact Material=Bronze, Contact Mating Length=0.25inch, Contact Plating=Gold, Depth=9.27mm, Gender=Male, Housing Color=Black, Housing Material=Polyester, Length=27.94mm, Mount="Through Hole", Number of Contacts=16, Number of Positions=16, Number of Rows=2, Orientation=Straight, Packaging=Rail/Tube, Pitch=2.54mm, Pricing 1="1=2.85000, 10=2.73600, 100=2.28000, 500=1.93800, 1000=1.65300, 5000=1.48200 (USD)", REACH SVHC="No SVHC", RoHS=Yes, Row Spacing=0.1inch, Stock 1=227, Supplier 1=Digi-Key, Termination=Solder
IC1: "Integrated Circuit", Manufacturer_Name=Microchip, Manufacturer_Part_Number="AVR64DD32-I/PT | MULTI-VOLTAGE I/O", Datasheet Link=https://www.microchip.com/en-us/product/AVR64DD32, Height=1.2mm
IC2 IC3 IC4 IC5: "Integrated Circuit", Manufacturer_Name="Texas Instruments", Mouser Part Number=595-LM358DR, Arrow Part Number=LM358DR, Arrow Price/Stock=https://www.arrow.com/en/products/lm358dr/texas-instruments?region=nac, Datasheet Link=https://www.ti.com/lit/ds/symlink/lm358.pdf?ts=1593170624750&ref_url=https%253A%252F%252Fwww.ti.com%252Fstore%252Fti%252Fen%252Fp%252Fproduct%252F%253Fp%253DLM358DR%2526keyMatch%253DLM358DR%2526tisearch%253DSearch-EN-everything%2526usecase%253DOPN, Height=1.75mm, Manufacturer_Part_Number=LM358DR, Mouser Price/Stock=https://www.mouser.co.uk/ProductDetail/Texas-Instruments/LM358DR?qs=Zu35EjizYSSY6pJ37yjmHA%3D%3D
LED1 LED2 LED3 LED4 LED5 LED6 LED7 LED8 LED9 LED11 LED12 LED13 LED14 LED15 LED16 LED17 LED18 LED19: library part 150060GS75000, "Wurth Elektronik 0603 green", Case Code (Imperial)=0603, Case Code (Metric)=1608, Color=Green, Forward Current=30mA, Forward Voltage=3.2V, Manufacturer="Wurth Electronics", Max Operating Temperature=85°C, Min Operating Temperature=-40°C, Package Quantity=4000, Test Current=20mA, Case/Package=0603, Category=LEDs, ComponentLink1Description=https://datasheet.ciiva.com/29562/150060gs75000-29562868.pdf?src-supplier=Digi-Key, ComponentLink1URL=https://datasheet.ciiva.com/29562/150060gs75000-29562868.pdf?src-supplier=Digi-Key, ComponentLink2Description=https://datasheet.ciiva.com/29279/759427-da-01-en-chipled-0603-w-kl-gruen-150060gs75000-29279201.pdf?src-supplier=Conrad, ComponentLink2URL=https://datasheet.ciiva.com/29279/759427-da-01-en-chipled-0603-w-kl-gruen-150060gs75000-29279201.pdf?src-supplier=Conrad, ComponentLink3Description=https://datasheet.ciiva.com/29562/150060gs75000-29562869.pdf?src-supplier=Digi-Key, ComponentLink3URL=https://datasheet.ciiva.com/29562/150060gs75000-29562869.pdf?src-supplier=Digi-Key, ComponentLink4Description=https://datasheet.ciiva.com/29562/150060gs75000-29562870.pdf?src-supplier=Digi-Key, ComponentLink4URL=https://datasheet.ciiva.com/29562/150060gs75000-29562870.pdf?src-supplier=Digi-Key, Dominant Wavelength=520nm, Height=0.7mm, Lead Free="Lead Free", Length=1.6mm, Lens Style=Clear,Rectangular, Luminous Intensity=430mcd, Manufacturer Part Number=150060GS75000, Mount="Surface Mount", Packaging="Tape and Reel", Pricing 1="1=0.14000, 50=0.13300, 100=0.11400, 500=0.09900 (USD)", REACH SVHC=Unknown, RoHS=Yes, Stock 1=71509, Supplier 1=Digi-Key, Viewing Angle=140°, Wavelength=520nm, Width=0.8mm
LED10 LED24: library part 150060BS75000, "Wurth Elektronik 0603 blue", Case Code (Imperial)=0603, Case Code (Metric)=1608, Color=Green, Forward Current=30mA, Forward Voltage=3.2V, Manufacturer="Wurth Electronics", Manufacturer Part Number=150060GS75000, Max Operating Temperature=85°C, Min Operating Temperature=-40°C, Package Quantity=4000, Test Current=20mA, Case/Package=0603, Category=LEDs, ComponentLink1Description=https://datasheet.ciiva.com/29562/150060gs75000-29562868.pdf?src-supplier=Digi-Key, ComponentLink1URL=https://datasheet.ciiva.com/29562/150060gs75000-29562868.pdf?src-supplier=Digi-Key, ComponentLink2Description=https://datasheet.ciiva.com/29279/759427-da-01-en-chipled-0603-w-kl-gruen-150060gs75000-29279201.pdf?src-supplier=Conrad, ComponentLink2URL=https://datasheet.ciiva.com/29279/759427-da-01-en-chipled-0603-w-kl-gruen-150060gs75000-29279201.pdf?src-supplier=Conrad, ComponentLink3Description=https://datasheet.ciiva.com/29562/150060gs75000-29562869.pdf?src-supplier=Digi-Key, ComponentLink3URL=https://datasheet.ciiva.com/29562/150060gs75000-29562869.pdf?src-supplier=Digi-Key, ComponentLink4Description=https://datasheet.ciiva.com/29562/150060gs75000-29562870.pdf?src-supplier=Digi-Key, ComponentLink4URL=https://datasheet.ciiva.com/29562/150060gs75000-29562870.pdf?src-supplier=Digi-Key, Dominant Wavelength=520nm, Height=0.7mm, Lead Free="Lead Free", Length=1.6mm, Lens Style=Clear,Rectangular, Luminous Intensity=430mcd, Mount="Surface Mount", Packaging="Tape and Reel", Pricing 1="1=0.14000, 50=0.13300, 100=0.11400, 500=0.09900 (USD)", REACH SVHC=Unknown, RoHS=Yes, Stock 1=71509, Supplier 1=Digi-Key, Viewing Angle=140°, Wavelength=520nm, Width=0.8mm
LED20 LED21: library part 150060RS75000, "Wurth Elektronik 0603 red", Case Code (Imperial)=0603, Case Code (Metric)=1608, Color=Green, Forward Current=30mA, Forward Voltage=3.2V, Manufacturer="Wurth Electronics", Manufacturer Part Number=150060GS75000, Max Operating Temperature=85°C, Min Operating Temperature=-40°C, Package Quantity=4000, Test Current=20mA, Case/Package=0603, Category=LEDs, ComponentLink1Description=https://datasheet.ciiva.com/29562/150060gs75000-29562868.pdf?src-supplier=Digi-Key, ComponentLink1URL=https://datasheet.ciiva.com/29562/150060gs75000-29562868.pdf?src-supplier=Digi-Key, ComponentLink2Description=https://datasheet.ciiva.com/29279/759427-da-01-en-chipled-0603-w-kl-gruen-150060gs75000-29279201.pdf?src-supplier=Conrad, ComponentLink2URL=https://datasheet.ciiva.com/29279/759427-da-01-en-chipled-0603-w-kl-gruen-150060gs75000-29279201.pdf?src-supplier=Conrad, ComponentLink3Description=https://datasheet.ciiva.com/29562/150060gs75000-29562869.pdf?src-supplier=Digi-Key, ComponentLink3URL=https://datasheet.ciiva.com/29562/150060gs75000-29562869.pdf?src-supplier=Digi-Key, ComponentLink4Description=https://datasheet.ciiva.com/29562/150060gs75000-29562870.pdf?src-supplier=Digi-Key, ComponentLink4URL=https://datasheet.ciiva.com/29562/150060gs75000-29562870.pdf?src-supplier=Digi-Key, Dominant Wavelength=520nm, Height=0.7mm, Lead Free="Lead Free", Length=1.6mm, Lens Style=Clear,Rectangular, Luminous Intensity=430mcd, Mount="Surface Mount", Packaging="Tape and Reel", Pricing 1="1=0.14000, 50=0.13300, 100=0.11400, 500=0.09900 (USD)", REACH SVHC=Unknown, RoHS=Yes, Stock 1=71509, Supplier 1=Digi-Key, Viewing Angle=140°, Wavelength=520nm, Width=0.8mm
LED22 LED23: library part 150060AS75000, "Wurth Elektronik 0603 amber", Case Code (Imperial)=0603, Case Code (Metric)=1608, Color=Green, Forward Current=30mA, Forward Voltage=3.2V, Manufacturer="Wurth Electronics", Manufacturer Part Number=150060GS75000, Max Operating Temperature=85°C, Min Operating Temperature=-40°C, Package Quantity=4000, Test Current=20mA, Case/Package=0603, Category=LEDs, ComponentLink1Description=https://datasheet.ciiva.com/29562/150060gs75000-29562868.pdf?src-supplier=Digi-Key, ComponentLink1URL=https://datasheet.ciiva.com/29562/150060gs75000-29562868.pdf?src-supplier=Digi-Key, ComponentLink2Description=https://datasheet.ciiva.com/29279/759427-da-01-en-chipled-0603-w-kl-gruen-150060gs75000-29279201.pdf?src-supplier=Conrad, ComponentLink2URL=https://datasheet.ciiva.com/29279/759427-da-01-en-chipled-0603-w-kl-gruen-150060gs75000-29279201.pdf?src-supplier=Conrad, ComponentLink3Description=https://datasheet.ciiva.com/29562/150060gs75000-29562869.pdf?src-supplier=Digi-Key, ComponentLink3URL=https://datasheet.ciiva.com/29562/150060gs75000-29562869.pdf?src-supplier=Digi-Key, ComponentLink4Description=https://datasheet.ciiva.com/29562/150060gs75000-29562870.pdf?src-supplier=Digi-Key, ComponentLink4URL=https://datasheet.ciiva.com/29562/150060gs75000-29562870.pdf?src-supplier=Digi-Key, Dominant Wavelength=520nm, Height=0.7mm, Lead Free="Lead Free", Length=1.6mm, Lens Style=Clear,Rectangular, Luminous Intensity=430mcd, Mount="Surface Mount", Packaging="Tape and Reel", Pricing 1="1=0.14000, 50=0.13300, 100=0.11400, 500=0.09900 (USD)", REACH SVHC=Unknown, RoHS=Yes, Stock 1=71509, Supplier 1=Digi-Key, Viewing Angle=140°, Wavelength=520nm, Width=0.8mm
R1 R2 R3 R4 R5 R6 R7 R8 R9 R10 R11 R12 R13 R14 R15 R16 R17 R18 R19 R20 R21 R22 R23 R24 R47 R48 R49 R50 R51 R52 R53 R54 R55 R56 R57 R60 R61 R62 R63 R64 R65 R66 R67 R68 R69 R70 R71 R72 R73 R74 R75 R76 R77 R78 R79 R80 R81 R82 R83 R84 R85 R86 R87 R88 R89 R90 R91 R92 R93 R94 R95 R96 R97 R98 R99 R100 R101 R102 R103 R104 R105 R106 R107 R108 R109 R110 R111 R112 R113 R114 R115 R116 R117 R118 R119 R120 R121 R122 R123 R124 R125 R126 R127 R128 R129 R130 R131 R132 R133 R134 R135 R136 R137 R138 R139 R140 R141 R142 R143 R144 R145 R146 R147 R148 R149 R150 R151 R152 R157 R158 R159 R160 R161 R162 R163 R164: library part RC0603JR-070RL, "YAGEO 0603 0 ohm", Manufacturer_Name=KEMET, Mouser Part Number=603-RC0603JR-070RL, Datasheet Link=https://datasheet.datasheetarchive.com/originals/distributors/Datasheets_SAMA/902f9e387b938f871d31120f5fc1d65e.pdf, Geometry.Height=0.55mm, Manufacturer_Part_Number=RC0603JR-070RL, Mouser Price/Stock=https://www.mouser.co.uk/ProductDetail/YAGEO/RC0603JR-070RL?qs=2cAdsCoAWRGWyPcuXgGiXQ%3D%3D
R25 R26 R27 R28 R29 R30 R31 R32 R33 R34 R35 R36 R38 R39 R40 R41 R42 R43 R44 R45 R46 R58: library part RC0603FR-13180RL, "YAGEO 0603 180 ohm", Manufacturer_Name=KEMET, Manufacturer_Part_Number=RC0603JR-070RL, Mouser Part Number=603-RC0603JR-070RL, Datasheet Link=https://datasheet.datasheetarchive.com/originals/distributors/Datasheets_SAMA/902f9e387b938f871d31120f5fc1d65e.pdf, Geometry.Height=0.55mm, Mouser Price/Stock=https://www.mouser.co.uk/ProductDetail/YAGEO/RC0603JR-070RL?qs=2cAdsCoAWRGWyPcuXgGiXQ%3D%3D
R37: library part RC0603FR-0747KL, "YAGEO 0603 47", Manufacturer_Name=KEMET, Manufacturer_Part_Number=RC0603JR-070RL, Mouser Part Number=603-RC0603JR-070RL, Datasheet Link=https://datasheet.datasheetarchive.com/originals/distributors/Datasheets_SAMA/902f9e387b938f871d31120f5fc1d65e.pdf, Geometry.Height=0.55mm, Mouser Price/Stock=https://www.mouser.co.uk/ProductDetail/YAGEO/RC0603JR-070RL?qs=2cAdsCoAWRGWyPcuXgGiXQ%3D%3D
R59: library part RC0603FR-10100RL, "YAGEO 0603 100 ohm", Manufacturer_Name=KEMET, Manufacturer_Part_Number=RC0603JR-070RL, Mouser Part Number=603-RC0603JR-070RL, Datasheet Link=https://datasheet.datasheetarchive.com/originals/distributors/Datasheets_SAMA/902f9e387b938f871d31120f5fc1d65e.pdf, Geometry.Height=0.55mm, Mouser Price/Stock=https://www.mouser.co.uk/ProductDetail/YAGEO/RC0603JR-070RL?qs=2cAdsCoAWRGWyPcuXgGiXQ%3D%3D
R153 R154 R155 R156: library part RC0603JR-07220RL, "YAGEO 0603 220 ohm", Manufacturer_Name=KEMET, Manufacturer_Part_Number=RC0603JR-070RL, Mouser Part Number=603-RC0603JR-070RL, Datasheet Link=https://datasheet.datasheetarchive.com/originals/distributors/Datasheets_SAMA/902f9e387b938f871d31120f5fc1d65e.pdf, Geometry.Height=0.55mm, Mouser Price/Stock=https://www.mouser.co.uk/ProductDetail/YAGEO/RC0603JR-070RL?qs=2cAdsCoAWRGWyPcuXgGiXQ%3D%3D
TP1 TP2 TP3 TP4 TP5 TP6 TP7 TP8 TP9 TP10 TP11: Color=Black, Manufacturer=Samtec, Manufacturer Part Number=TST-105-01-G-D, Max Operating Temperature=125°C, Min Operating Temperature=-55°C, Category="Headers and Wire Housings", ComponentLink1Description=https://datasheet.ciiva.com/739/tst-mkt-739845.pdf?src-supplier=Digi-Key, ComponentLink1URL=https://datasheet.ciiva.com/739/tst-mkt-739845.pdf?src-supplier=Digi-Key, ComponentLink2Description=https://datasheet.ciiva.com/10018/htst-10018510.pdf?src-supplier=Avnet, ComponentLink2URL=https://datasheet.ciiva.com/10018/htst-10018510.pdf?src-supplier=Avnet, Connector Type="Male Pin", Contact Material=Bronze, Contact Mating Length=0.25inch, Contact Plating=Gold, Depth=9.27mm, Gender=Male, Housing Color=Black, Housing Material=Polyester, Length=27.94mm, Mount="Through Hole", Number of Contacts=16, Number of Positions=16, Number of Rows=2, Orientation=Straight, Packaging=Rail/Tube, Pitch=2.54mm, Pricing 1="1=2.85000, 10=2.73600, 100=2.28000, 500=1.93800, 1000=1.65300, 5000=1.48200 (USD)", REACH SVHC="No SVHC", RoHS=Yes, Row Spacing=0.1inch, Stock 1=227, Supplier 1=Digi-Key, Termination=Solder
U1: "Octal Buffers/Drivers With 3-State Outputs", Manufacturer_Name="Texas Instruments", Mouser Part Number=595-SN74ABT240ADBR, Datasheet Link=http://www.ti.com/lit/gpn/sn74abt240a, Geometry.Height=2mm, Manufacturer_Part_Number=SN74ABT240ADBR, Mouser Price/Stock=https://www.mouser.co.uk/ProductDetail/Texas-Instruments/SN74ABT240ADBR?qs=JHHQeKcAU3Dt82k%252BVyiYdw%3D%3D
U2: "Hex Inverters", Manufacturer_Name="Texas Instruments", Mouser Part Number=595-SN74AC04PWR, Datasheet Link=http://www.ti.com/lit/gpn/sn74ac04, Geometry.Height=1.2mm, Manufacturer_Part_Number=SN74AC04PWR, Mouser Price/Stock=https://www.mouser.co.uk/ProductDetail/Texas-Instruments/SN74AC04PWR?qs=RZS%252BpEsUn7pRvPNqsga4SA%3D%3D

## Free pads (board coordinates)
  round 200 hole 170: 37(200,200) 37(200,3800) 37(5400,200) 37(5400,3800)

## Via types
v1: diameter 50, hole 28, Top Layer to Bottom Layer, 177 vias

## Nets (pads, with @x,y where several pads share a name; then routed paths per layer and width w, separated by ;. In a path a pad name is that pad's centre, name@x,y a point inside that pad or via, vN(x,y) a via of type N, cw(c..) or ccw(c..) an arc to the next point about the centre after c; other vN are vias at no path point)
+3.3: H2.3 R37.1 TP4.1 | length 5079.6
  Bottom Layer w10: H2.3@200,1800 250,1750 TP4.1@900,1750 1023,1873 1400,1873 1712,2185 2145,2185 2248,2288 3808,2288 4000,2480 4000,3208.5 3853.7,3354.8 3853.7,3357.76 3842.95,3368.5 R37.1@3840,3368.5
+5: B1.2 B2.2 B3.2 B4.2 B5.2 C1.1 C2.1 C3.1 C4.1 C5.1 C6.1 C7.1 C8.1 C9.1 C10.1 C11.1 C12.1 C13.1 C14.1 C15.1 C16.1 C17.1 C18.1 C27.1 C28.1 C29.1 H1.2 H2.1 IC1.10 IC1.18 IC1.28 R25.2 R26.2 R27.2 R28.2 R29.2 R30.2 R31.2 R32.2 R33.2 R34.2 R35.2 R36.2 R39.2 R40.2 R41.2 R42.2 R43.2 R44.2 R45.2 R46.2 R58.2 R59.1 R153.1 U1.20 U2.14 | length 7016.1
  Top Layer w10: v1(555,745) 565,745 572.2,737.8 B2.2@658.39,737.8 ; v1(565,355) 575.39,355 590.86,339.53 656.65,339.53 B3.2@658.39,337.8 ; U1.20@1289.76,2615.16 1303.91,2615.16 1307.76,2619.02 1307.76,2633.16 1334.61,2660 v1(1370,2660) ; v1@1505,355 v1(1515,355) 1555,355 1570.47,339.53 1616.65,339.53 B4.2@1618.39,337.8 ; v1(1515,765) 1542.2,737.8 B1.2@1618.39,737.8 ; IC1.10@2114.58,1473.15 2114.58,1551.26 2143.32,1580 v1(2208.32,1580) v1@2213.32,1580 ; IC1.28@2209.06,1806.85 2209.06,1584.25 v1@2213.32,1580 ; IC1.18@2360.17,1561.26 2355.48,1565.94 2277.37,1565.94 2263.32,1580 v1@2213.32,1580 ; v1(3355.86,1304.36) v1@3358.92,1301.3 ; v1@3358.92,1300.5 B5.2@3503.39,1300.5 ; U2.14@3835.67,2666.77 v1(3894.71,2666.77) ; v1(3894.73,1658) 3913.73,1658 3950.23,1621.5 R153.1@3970,1621.5
  Bottom Layer w10: v1(555,745) 559.36,745 580.86,766.5 C6.1@665,766.5 666.5,767.99 C5.1@725,767.99 725,819.14 730.86,825 811.46,825 C2.1@825,811.46 ; v1(565,355) 623.5,355 C12.1@625,356.5 ; v1(582,540) 582,366.5 592,356.5 C12.1@625,356.5 ; R46.2@750,3368.5 R45.2@850,3368.5 R44.2@950,3368.5 R43.2@1050,3368.5 R42.2@1150,3368.5 R41.2@1250,3368.5 R40.2@1350,3368.5 R39.2@1450,3368.5 1450,3330 v1(1530,3250) ; C8.1@795,401.46 714.56,401.46 708.7,395.6 708.7,367.24 697.95,356.5 C12.1@625,356.5 ; v1(1515,355) 1595,355 C9.1@1605,365 1606.5,366.5 C10.1@1685,366.5 1675,376.5 1675,425.6 1680.86,431.46 C7.1@1795,431.46 ; v1(1515,765) 1525.82,765 1534.33,756.5 C3.1@1615,756.5 C4.1@1675,756.5 1675,809.14 1680.86,815 1761.46,815 C1.1@1775,801.46 ; R58.2@1630,3368.5 R59.1@1775,3368.5 R30.2@1930,3368.5 R28.2@2075,3368.5 R29.2@2200,3368.5 2261.5,3368.5 2300,3330 v1(2300,3210) ; C13.1@1913.32,1608.5 C18.1@1973.32,1608.5 C15.1@2033.32,1608.5 2173.95,1608.5 2202.46,1580 v1(2208.32,1580) 2236.82,1608.5 C16.1@2333.32,1608.5 C14.1@2393.32,1608.5 C17.1@2453.32,1608.5 ; R35.2@2385,3368.5 R34.2@2550,3368.5 R33.2@2700,3368.5 R32.2@2860,3368.5 R31.2@3000,3368.5 3051.5,3368.5 3110,3310 v1(3110,3250) ; R27.2@3230,3368.5 R26.2@3430,3368.5 R25.2@3600,3368.5 3681.5,3368.5 v1(3720,3330) ; v1(3355.86,1304.36) v1@3357.25,1302.97 ; v1@3357.25,1300.5 3505.84,1300.5 3512.49,1307.16 3512.49,1309.62 ; C27.1@3510,1381.42 3512.49,1378.93 3512.49,1309.62 ; C28.1@3619.81,1309.81 3518.35,1309.81 3515.51,1312.65 3512.49,1309.62 ; C28.1@3620,1310 C29.1@3690,1310 ; R36.2@4060,3368.5 4108.5,3368.5 v1(4170,3430)
+6: C19.1 C20.1 C21.1 C22.1 C23.1 C24.1 C25.1 C26.1 IC2.8 IC3.8 IC4.8 IC5.8 R38.2 R64.2 R154.2 | length 6561.1
  Top Layer w10: v1(2740,870) 2745,865 2788.5,865 2805.24,848.27 IC2.8@2805.24,790 ; v1(2778.5,495) 2825.24,448.27 IC5.8@2825.24,400 ; R64.2@3783.5,1890 3783.5,1856 3830.5,1809 3968,1809 ; v1(3810,860) 3884.14,860 3890,854.14 3890,794.76 3888.5,793.27 IC3.8@3885.24,790 3845,790 3845,416 3861,400 IC4.8@3905.24,400 3905.24,474.14 3899.38,480 v1(3820,480) ; IC3.8@3889,790 4030,931 4030,1747 3968,1809 ; R154.2@4160,1621.5 v1(4160,1760) 4160,1761 4112,1809 3968,1809
  Bottom Layer w10: C19.1@2648.5,766.5 C20.1@2738.5,766.5 ; C26.1@2678.5,376.5 C25.1@2748.5,376.5 ; v1(2740,870) 2738.5,868.5 2738.5,815 C20.1@2738.5,766.5 ; v1(2778.5,495) 2778.5,406.5 2762.2,390.2 2762.2,387.24 2751.46,376.5 C25.1@2748.5,376.5 ; C23.1@3758.5,366.5 3760,367.99 C24.1@3828.5,367.99 3818.5,377.99 3818.5,478.5 v1(3820,480) ; v1(3810,860) 3810,849.18 3798.5,837.68 3798.5,835 C21.1@3798.5,766.5 C22.1@3738.5,766.5 2760,766.5 ; v1(4160,1760) 4180,1760 4320,1900 R38.2@4320,3368.5 ; C20.1@2738.5,766.5 2760,766.5 ; C25.1@2748.5,376.5 2748.5,584.5 2768,604 2768,758.5 2760,766.5
ADC_Channel_1: R105.1 R129.2 R157.1 | length 4963.4
  Top Layer w10: R129.2@2368.5,600 2368.5,618.5 2395,645 2395,894 v1(2466,965) ; v1(4620,1035) 4676.5,978.5 4768,978.5 4791,1001.5 4791,1243 4800,1252 4864,1252 4900,1288 4900,1600 4910,1610 4960,1610 4968.7,1618.7 4968.7,2070.3 4897.75,2141.25 4897.75,2799.25 4998.5,2900 R157.1@4998.5,2940
  Bottom Layer w10: v1(2466,965) 4586,965 4620,999 v1(4620,1035)
ADC_Channel_2: R111.1 R135.2 R158.1 | length 4088.6
  Top Layer w10: R135.2@3051.5,600 3051.5,602.95 3062.24,613.7 3072.7,613.7 v1(3494,1035) ; v1(4540,1015) 4603,952 4820.44,952 4826.3,957.86 4826.3,967.76 4837.05,978.5 4886,978.5 4922.5,1015 4968.7,1015 4983.7,1030 4983.7,2077.85 4912.75,2148.79 4912.75,2403.36 4927,2417.61 4927,2728.5 4998.5,2800 R158.1@4998.5,2840
  Bottom Layer w10: v1(3494,1035) 3494,1025.86 3529.86,990 4516.72,990 4540,1013.28 v1(4540,1015)
ADC_Channel_3: R117.1 R146.2 R159.1 | length 5903.4
  Top Layer w10: v1(2342,992) 2342,366 2358,350 2384,350 2395,339 2395,224 2386,215 R146.2@2368.5,215 ; v1(4905,938) 4905,964.5 4919,978.5 R117.1@4940,978.5 4960,978.5 4998.7,1017.21 4998.7,2100.3 4927.75,2171.25 4927.75,2383.04 4942,2397.29 4942,2659.6 4998.5,2716.11 R159.1@4998.5,2740
  Bottom Layer w10: v1(2342,992) 2349.65,984.35 2370.65,984.35 2445,910 2481,910 2521,950 4645,950 4699,896 4699,672 4732,639 4857,639 4905,687 v1(4905,938)
ADC_Channel_4: R123.1 R150.2 R160.1 | length 6304.8
  Top Layer w10: v1(2926,265) 3013,265 3038,240 3038,215 R150.2@3051.5,215 ; R160.1@4998.5,2640 4982.75,2640 4972.75,2630 4972.75,2511.25 4992,2492 5344,2492 5378,2458 5378,2168 5525,2021 v1(5525,640) v1(5525,395) ; R123.1@5040,978.5 5040,896 5063,873 v1(5298,873)
  Bottom Layer w10: v1(2926,265) 3547,265 3618,336 4249,336 4308,395 v1(5525,395) ; v1(5298,873) 5298,672 5330,640 v1(5525,640)
ADC_Channel_5: R128.2 R130.2 R161.1 | length 4522.7
  Top Layer w10: R130.2@3468.5,600 3468.5,512 3537.5,443 v1(3668,443) ; R161.1@4998.5,2540 4998.5,2581 5025,2607.5 5025,2669 4972.75,2669 4957.38,2653.62 4957.38,2386.38 4942.75,2371.75 4942.75,2194.25 5190,1947 v1(5190,963.5) 5175,978.5 R128.2@5140,978.5
  Bottom Layer w10: v1(3668,443) 3740,515 3855,515 3933.5,436.5 5164.5,436.5 5240,512 5240,640 5190,690 v1(5190,963.5)
ADC_Channel_6: R122.2 R136.2 R162.1 | length 3412.2
  Top Layer w10: R136.2@4111.5,600 4137.05,600 4363,825.95 v1(4363,1229) ; R162.1@4998.5,2440 4998.5,2392 4957.75,2351.25 4957.75,2201.25 5280,1879 v1(5280,1504) 5280,1027 5248,995 5240,995 R122.2@5240,978.5
  Bottom Layer w10: v1(4363,1229) 4638,1504 v1(5280,1504)
ADC_Channel_7: R116.2 R141.2 R163.1 | length 4014.5
  Top Layer w10: R141.2@3468.5,215 3468.5,248.5 3488,268 3559.21,268 3614.21,323 3825,323 3872,276 4160,276 4196,312 4196,482 4524,810 5298,810 5340,852 R116.2@5340,978.5 5360,978.5 5380,998.5 5380,1847 5031,2196 4987.75,2196 4972.75,2211 4972.75,2269 4998.5,2294.75 R163.1@4998.5,2340
ADC_Channel_8: R110.2 R144.2 R164.1 | length 3378.9
  Top Layer w10: R144.2@4111.5,215 5125,215 5280,370 5280,739 5440,899 R110.2@5440,978.5 5440,999 5424,1015 5406,1015 5400,1021 5400,1853 5042,2211 5028.5,2211 5013.21,2226.3 4998.5,2226.3 R164.1@4998.5,2240
ADC_CS_1: R2.1 R53.1 R95.1 | length 4295
  Top Layer w10: R2.1@473.5,835 477,835 926.15,1284.15 1081.32,1284.15 1357.17,1560 R95.1@1743.5,1560 1762,1560 1770,1568 1770,1886 1767,1889 1632,1889 1570,1951 v1(1570,2400) ; v1(2940,2400) 2990,2400 3010,2420 3010,2658.5 R53.1@3000,2668.5
  Bottom Layer w10: v1(1570,2400) v1(2940,2400)
ADC_CS_2: R13.1 R54.1 R97.1 | length 4400.6
  Top Layer w10: R13.1@473.5,435 473.5,456 483.5,466 672,466 704,498 704,876.33 1327.67,1500 R97.1@1743.5,1500 1760,1500 1770,1490 v1(1770,1340) ; R54.1@2860,2668.5 2860,2279.06 2966,2173.06 v1(2966,1841)
  Bottom Layer w10: v1(1770,1340) 2465,1340 v1(2966,1841)
ADC_CS_3: R1.1 R55.1 R99.1 | length 2858.7
  Top Layer w10: R1.1@1433.5,845 1433.5,1430.5 v1(1450,1447) ; v1(1699,1451) 1743.5,1451 R99.1@1743.5,1440 ; v1(2545,2193) 2700,2348 R55.1@2700,2668.5
  Bottom Layer w10: v1(1699,1451) 1505,1451 ; v1(2545,2193) 2512,2160 2214,2160 1505,1451 ; 1505,1451 1501,1451 1454,1451 v1(1450,1447) 1501,1447 1505,1451
ADC_CS_4: R14.1 R56.1 R101.1 | length 4076.9
  Top Layer w10: R14.1@1433.5,435 1416,435 1407,444 1407,1465 1424,1482 1468,1482 1771.5,1178.5 R101.1@2060,1178.5 2060,1205 2489,1205 2585,1301 2585,1984 2549,2020 2361,2020 2361,2134 2550,2323 R56.1@2550,2668.5
ADC_CS_5: B5.1 R57.1 R94.2 | length 3256.6
  Top Layer w10: v1(2310,2820) 2310,2710 2351.5,2668.5 R57.1@2385,2668.5 ; R94.2@2621.5,1470 2621.5,1384.5 ; v1(2770,2820) 2770,2339.53 2929.53,2180 2929.53,1370 ; B5.1@3503.39,1326.89 3430,1326.89 3386.89,1370 2929.53,1370 ; 2621.5,1384.5 2621.5,1367.5 2639,1350 2656,1350 ; 2621.5,1384.5 2656,1350 ; 2656,1350 2929.53,1350 2929.53,1370
  Bottom Layer w10: v1(2310,2820) v1(2770,2820)
ADC_IN_1: R6.2 R107.1 | length 4106.9
  Top Layer w10: R6.2@1036.5,620 1036.5,655.55 1098,717.05 v1(1098,778) ; v1(4313.5,533.5) R107.1@4740,533.5
  Bottom Layer w10: v1(1098,778) 1180,860 2521,860 2566,905 2918.79,905 2920.56,903.23 4071.77,903.23 4313.5,661.5 v1(4313.5,533.5)
ADC_IN_2: R10.2 R113.1 | length 4636.7
  Top Layer w10: R10.2@473.5,585 501,585 510,576 510,539 544,505 v1(643.98,505) ; v1(4655,480) 4820,480 4840,500 R113.1@4840,533.5
  Bottom Layer w10: v1(643.98,505) 2073.62,505 2228.62,350 3498.92,350 3626.92,478 3678,478 3731,531 4196.5,531 4263.5,464 4629.14,464 4645.14,480 v1(4655,480)
ADC_IN_3: R16.2 R119.1 R149.2 | length 4674.8
  Top Layer w10: R16.2@1036.5,220 1036.5,86.5 1088,35 2070,35 2340,305 R149.2@2368.5,305 2368.5,280.5 2342,254 2342,160 2381,121 v1(2446,121) ; v1(4911,346) 4940,375 R119.1@4940,533.5
  Bottom Layer w10: v1(2446,121) 2497,70 2822,70 2888,136 4701,136 v1(4911,346)
ADC_IN_4: R20.2 R125.1 R152.2 | length 5325.7
  Top Layer w10: R20.2@473.5,205 473.5,112.5 v1(536,50) ; v1(2925,35) 3078,188 3078,296 3069,305 ; R152.2@3051.5,305 3069,305 ; R125.1@5040,533.5 5040,297 4993,250 4096,250 4080,234 4080,184 4026,130 3311,130 3136,305 3069,305
  Bottom Layer w10: v1(536,50) 571,15 2905,15 v1(2925,35)
ADC_IN_5: R4.2 R126.2 | length 4072.4
  Top Layer w10: R4.2@1996.5,620 1996.5,617 1979,617 1965,603 1965,460 1980,445 2035.14,445 2041,450.86 2041,776 2168,903 v1(2168,931) ; v1(4657,775) 4657,608 4696,569 5053.1,569 5077.84,544.25 5129.25,544.25 R126.2@5140,533.5
  Bottom Layer w10: v1(2168,931) 2400,931 2441,890 2491,890 2536,935 2947.02,935 2948.79,933.23 4498.77,933.23 v1(4657,775)
ADC_IN_6: R8.2 R120.2 | length 4667.7
  Top Layer w10: R8.2@1433.5,585 1433.5,768.5 1465,800 1465,905 1479,919 v1(1607,919) ; v1(5085,765) 5085,570.86 5090.86,565 5165,565 5196.5,533.5 R120.2@5240,533.5
  Bottom Layer w10: v1(1607,919) 1651,875 2506,875 2551,920 2933.79,920 2935.56,918.23 4188.77,918.23 4542,565 5017.28,565 5085,632.72 v1(5085,765)
ADC_IN_7: R18.2 R114.2 | length 3742.3
  Top Layer w10: R18.2@1996.5,220 v1(2188,220) ; v1(5275,300) 5340,365 R114.2@5340,533.5
  Bottom Layer w10: v1(2188,220) 2361,47 2836.52,47 2874.52,85 5106,85 5275,254 v1(5275,300)
ADC_IN_8: R22.2 R108.2 | length 4702.6
  Top Layer w10: v1(1433.5,71) R22.2@1433.5,205 ; R108.2@5440,533.5 5440,380 5510,310 5510,128 v1(5452,70)
  Bottom Layer w10: v1(1433.5,71) 1474.5,30 2849.52,30 2889.52,70 v1(5452,70)
ADC_Unity_1: R109.1 R131.1 R133.2 | length 2934.5
  Top Layer w10: R133.2@2368.5,690 2368.5,958.5 v1(2490,1080) ; v1(4535,1525) 4651.5,1641.5 R109.1@4740,1641.5
  Bottom Layer w10: v1(2490,1080) 2500.82,1080 2514.82,1066 2784.87,1066 3243.87,1525 v1(4535,1525)
ADC_Unity_2: R115.1 R137.1 R139.2 | length 2595.3
  Top Layer w10: R139.2@3051.5,690 3045,690 3045,730.75 3051.5,737.25 R137.1@3051.5,780 3051.5,793.7 3051.5,1001.65 3051.5,1005.79 3054.42,1008.72 3055.19,1009.48 v1(3095,1035) ; v1(4594,1370) 4758,1370 4780,1392 4780,1569 4827,1616 4827,1641.5 R115.1@4840,1641.5
  Bottom Layer w10: v1(3095,1035) 3095,1083.5 3106.5,1095 3515,1095 3605,1005 4229,1005 v1(4594,1370)
ADC_Unity_3: R121.1 R148.1 | length 3535.1
  Top Layer w10: R148.1@2368.5,395 2368.5,416 2400.5,448 2604,448 2721,565 v1(2815,565) ; v1(4175,725) 4222,725 4255,758 4255,1238 4288,1271 4566,1271 4649,1354 4864,1354 4880,1370 4880,1625.5 4896,1641.5 R121.1@4940,1641.5
  Bottom Layer w10: v1(2815,565) 2980,730 4170,730 v1(4175,725)
ADC_Unity_4: R127.1 R151.1 | length 3043.5
  Top Layer w10: R151.1@3051.5,395 3131,395 3162,426 3490,426 3500,416 3500,368 3518,350 3582,350 3605,373 3965.29,373 4494.92,902.63 4928.63,902.63 5011,985 5011,1002 5024,1015 5072,1015 5080,1023 5080,1633.5 5072,1641.5 R127.1@5040,1641.5
ADC_Unity_5: R124.2 R132.1 R134.2 | length 3257.6
  Top Layer w10: R132.1@3468.5,780 R134.2@3468.5,690 3468.5,652.5 3497,624 3497,576 v1(3538,535) ; v1(5105,912) 5100,917 5100,1601 5120,1621 5140,1621 R124.2@5140,1641.5
  Bottom Layer w10: v1(3538,535) 3689,535 3705,551 4225.5,551 4280.5,496 4338,496 4366,524 5205,524 5225,544 5225,587 5202,610 5110.86,610 5105,615.86 5105,720.5 5125,740.5 5125,805.84 5105,825.84 v1(5105,912)
ADC_Unity_6: R118.2 R138.1 R140.2 | length 2085.8
  Top Layer w10: R140.2@4111.5,690 R138.1@4111.5,780 4114.34,782.84 4114.34,807.84 4240,933.5 v1(4240,1570) ; R118.2@5240,1641.5 v1(5240,1728)
  Bottom Layer w10: v1(4240,1570) 4240,1571 4397,1728 v1(5240,1728)
ADC_Unity_7: R112.2 R142.1 R143.2 | length 4053.6
  Top Layer w10: v1(3025,1116) 3025,362 3456,362 3468.5,374.5 ; R143.2@3468.5,305 3468.5,374.5 ; R142.1@3468.5,395 3468.5,374.5 ; v1(5317.5,1699.5) 5340,1677 R112.2@5340,1641.5
  Bottom Layer w10: v1(3025,1116) 3581,1116 3651.44,1045.56 3759.14,1045.56 3765,1051.42 3765,1224 3786,1245 4143,1245 4263,1365 4465,1365 4708,1608 5226,1608 v1(5317.5,1699.5)
ADC_Unity_8: R106.2 R145.1 R147.2 | length 2664.2
  Top Layer w10: R147.2@4111.5,305 R145.1@4111.5,395 v1(4156,395) ; v1(5405,457) 5405,725 5480,800 5480,1640.5 5479,1641.5 R106.2@5440,1641.5
  Bottom Layer w10: v1(4156,395) 4177,416 5364,416 v1(5405,457)
CPU_CS: R52.1 R85.2 R102.2 | length 3518.5
  Top Layer w10: v1(931,1400) 931.5,1400.5 R85.2@931.5,1450 v1(1011,1450) ; v1(1710,1937) 1710,2151 1930,2371 R52.1@1930,2668.5 ; v1(2225,1110) 2225,1120.82 2240,1135.82 R102.2@2240,1178.5
  Bottom Layer w10: v1(931,1400) 1131,1200 2150,1200 2214.22,1135.78 2214.22,1131.61 2225,1120.82 v1(2225,1110) ; v1(1011,1450) 1011,1573 1056,1618 1490,1618 1612,1740 1676.45,1740 1710,1773.55 v1(1710,1937)
CPU_D0: R66.1 R70.1 U1.2 | length 2796.4
  Top Layer w10: R70.1@631.5,1900 631.5,2610.67 650.82,2630 v1(720,2630) ; v1(890,2640) 897.65,2632.35 897.65,2612.35 920.43,2589.57 U1.2@1010.24,2589.57 ; R66.1@2150,2051.5 v1(2150,2302)
  Bottom Layer w10: v1(720,2630) 864.14,2630 866.49,2632.35 882.35,2632.35 v1(890,2640) 897.65,2632.35 897.65,2612.35 1185,2325 2116.43,2325 2139.43,2302 v1(2150,2302)
CPU_D1: R68.1 R73.1 U1.4 | length 3309.4
  Top Layer w10: R73.1@631.5,1800 698,1800 810,1912 v1(810,2500) 817.65,2507.65 817.65,2526.83 829.21,2538.39 U1.4@1010.24,2538.39 ; R68.1@2090,2051.5 2090,2390 2100,2400 2222.95,2400 v1(2250,2340)
  Bottom Layer w10: v1(810,2500) 810,2340 950,2200 2130,2200 2242.35,2312.35 2242.35,2332.35 v1(2250,2340)
CPU_D2: R71.1 R76.1 U1.6 | length 2512.8
  Top Layer w10: R76.1@631.5,1700 v1(730,1700) 737.65,1707.65 753.65,1707.65 894,1848 894,1974.79 915,1995.79 915,2442.2 960,2487.2 U1.6@1010.24,2487.2 ; v1(1774.5,2051.5) R71.1@2030,2051.5
  Bottom Layer w10: v1(730,1700) 762.12,1667.88 1377.88,1667.88 1749.71,2039.71 1751.89,2039.71 1763.67,2051.5 v1(1774.5,2051.5)
CPU_D3: R74.1 R80.1 U1.8 | length 2118.4
  Top Layer w10: R80.1@631.5,1600 889.69,1600 908.39,1618.7 970.14,1618.7 976,1624.56 976,2013.5 964,2025.5 964,2205.75 930,2239.75 930,2420 946.02,2436.02 U1.8@1010.24,2436.02 ; v1(1530,1885) 1535.82,1885 1560.82,1860 R74.1@1743.5,1860
  Bottom Layer w10: v1(976,1703) 1363.5,1703 1522.35,1861.84 1522.35,1877.35 v1(1530,1885)